# EAGLE board Mk4 Final a (EAGLE 9.0.1), part 1 of 3
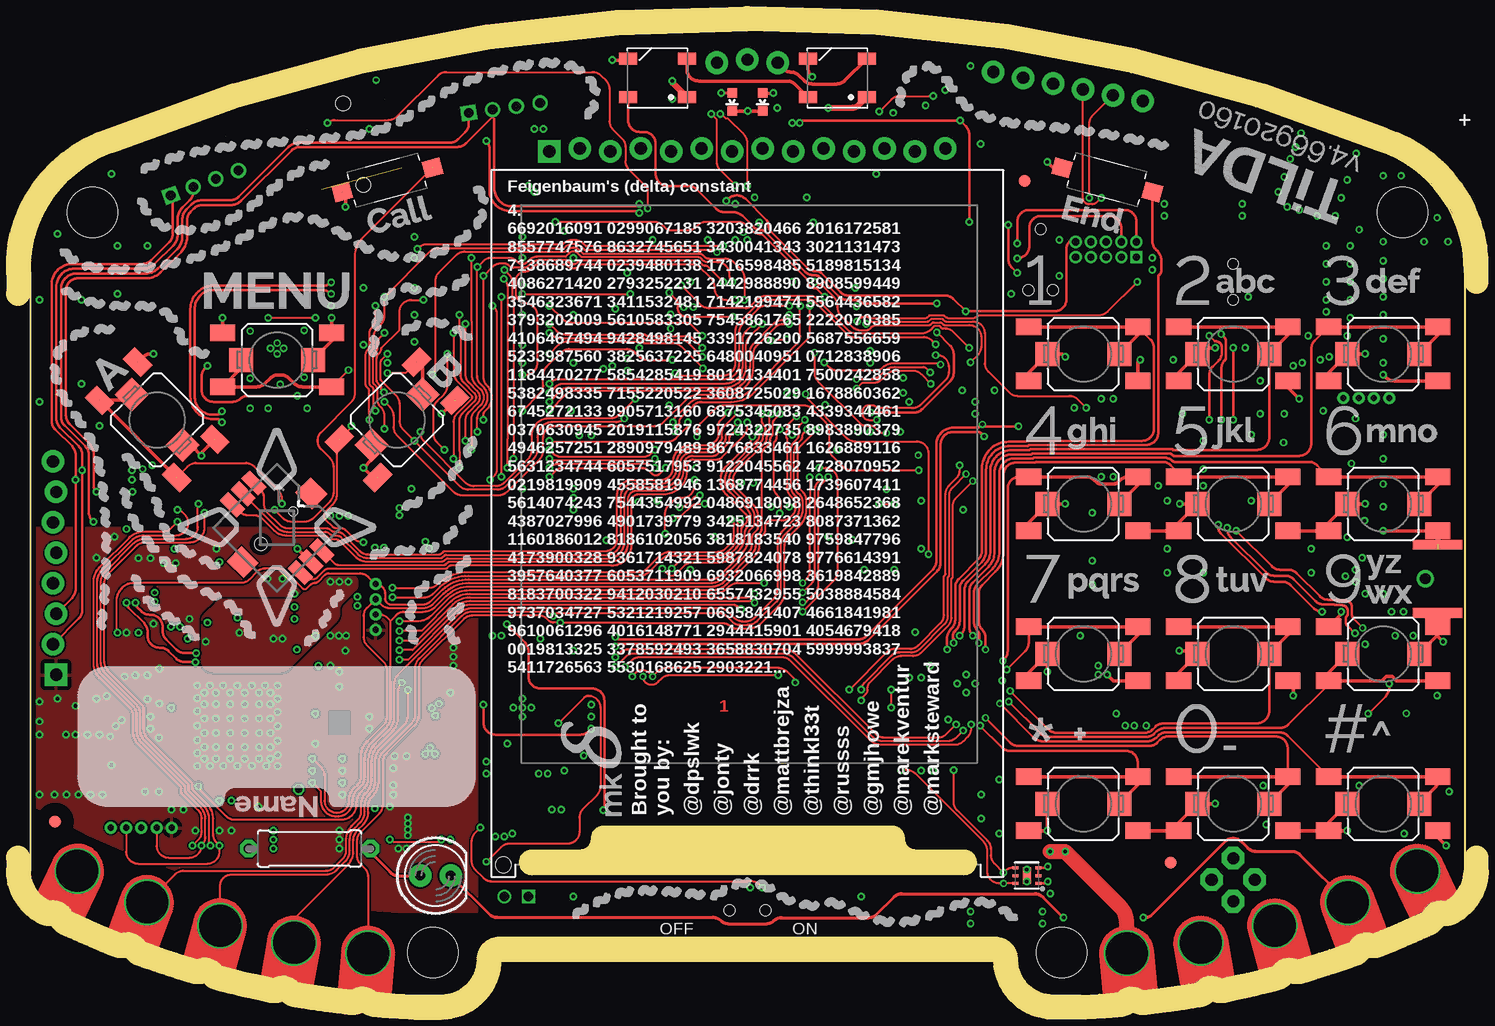
[diagram p0: board, top side]
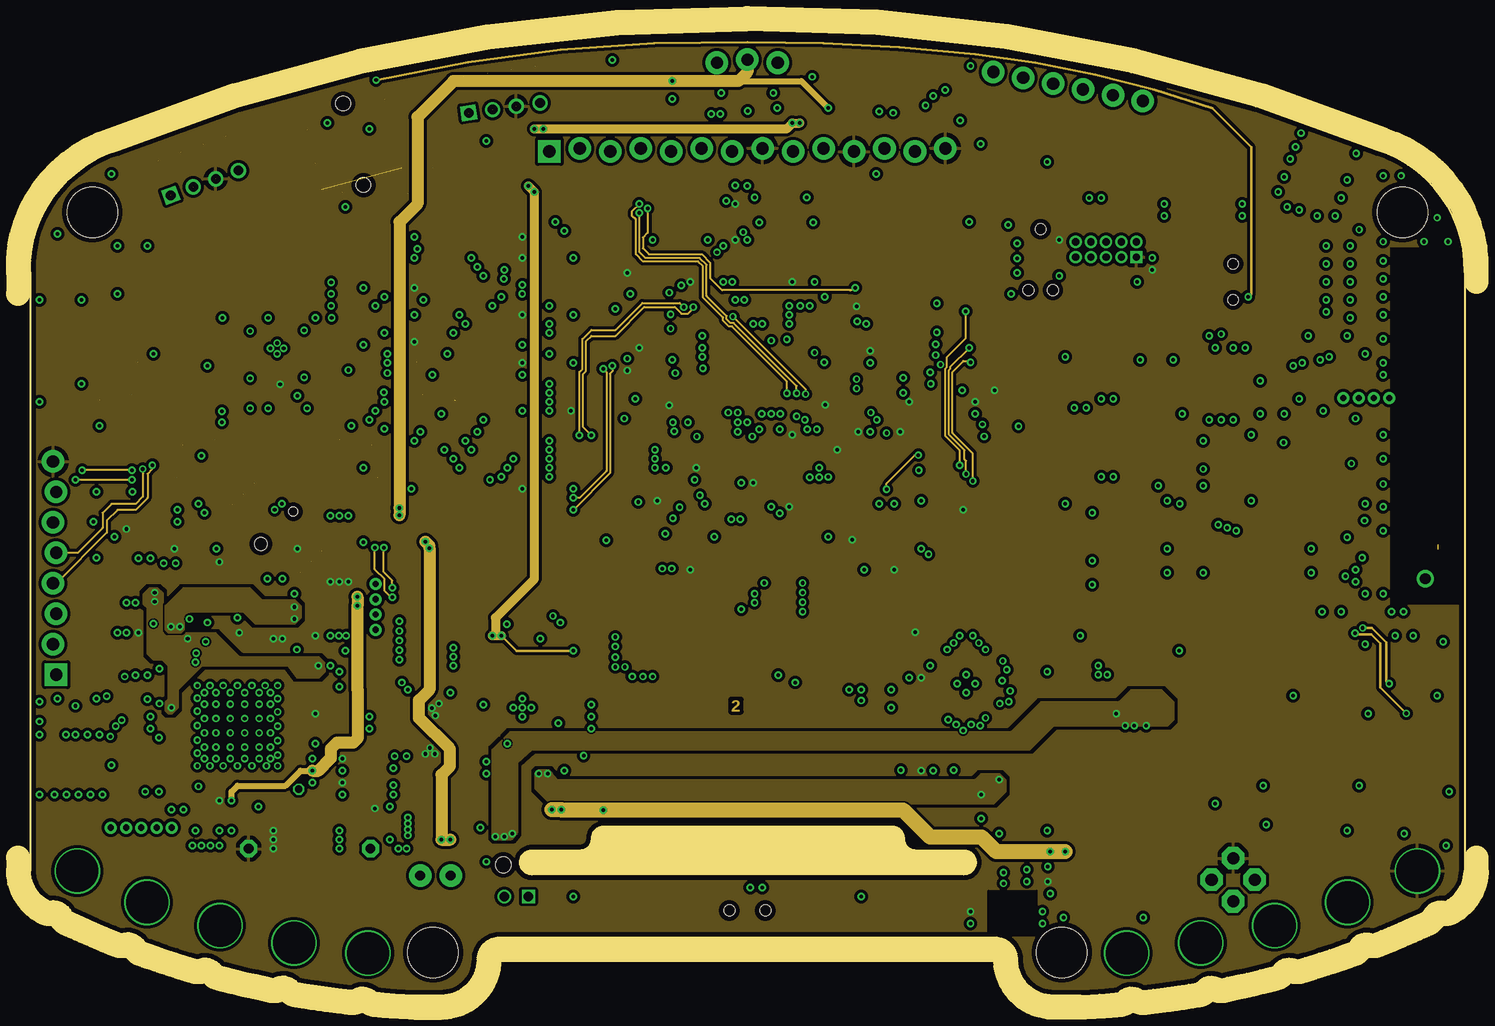
[diagram p1: board, inner layer 3V3@2]
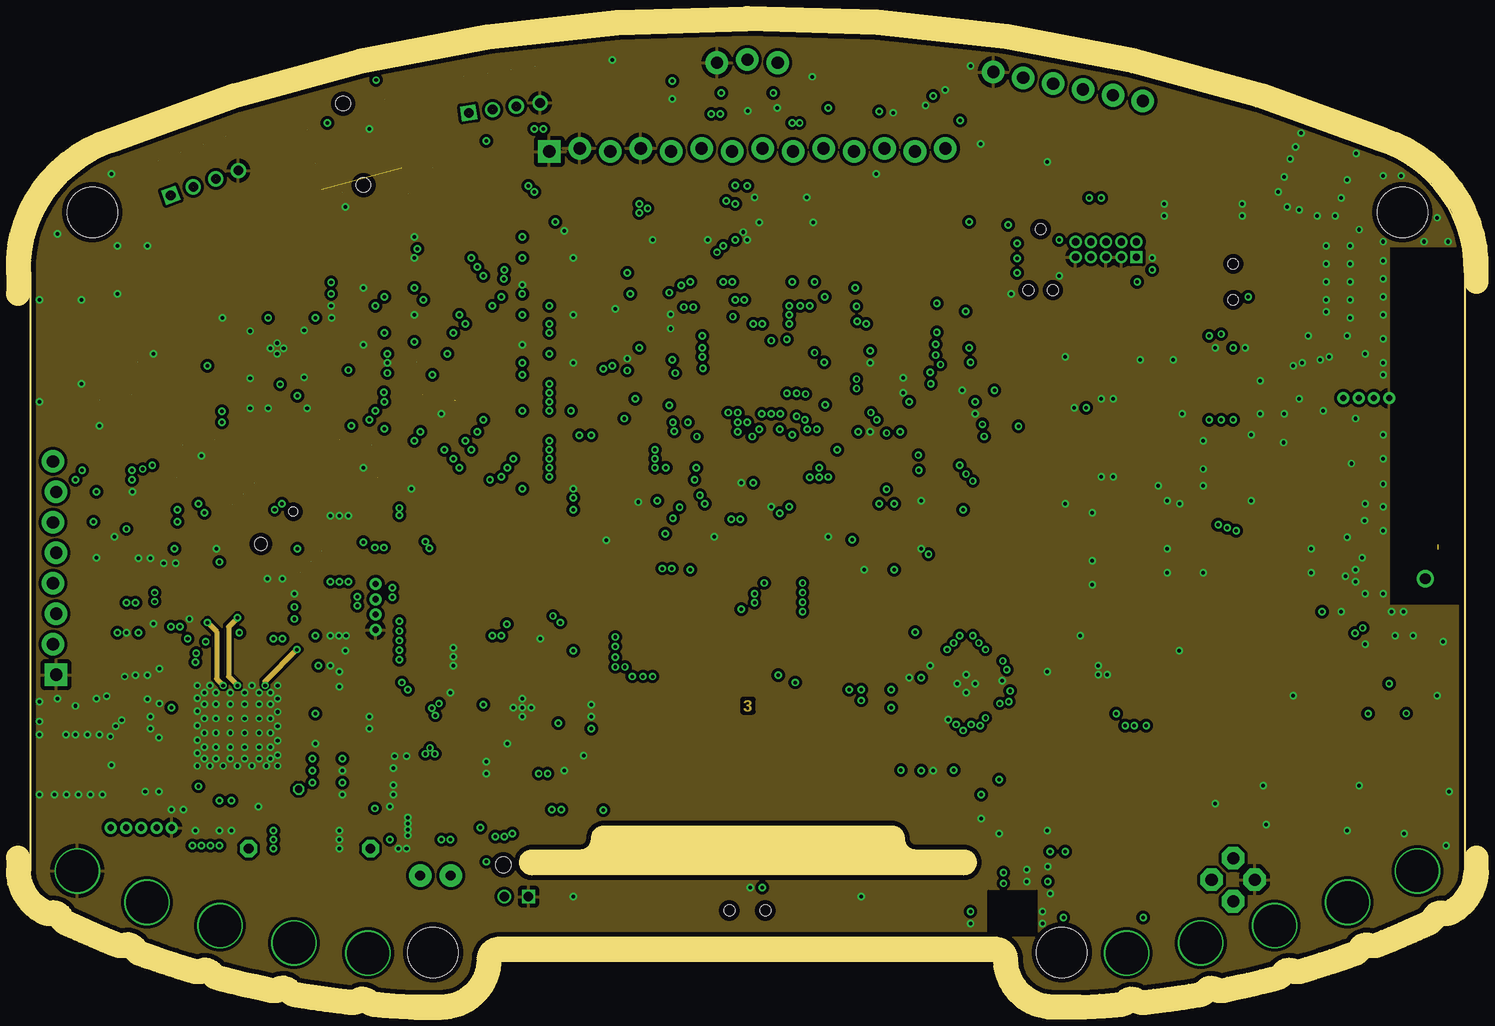
[diagram p2: board, inner layer GND@3]
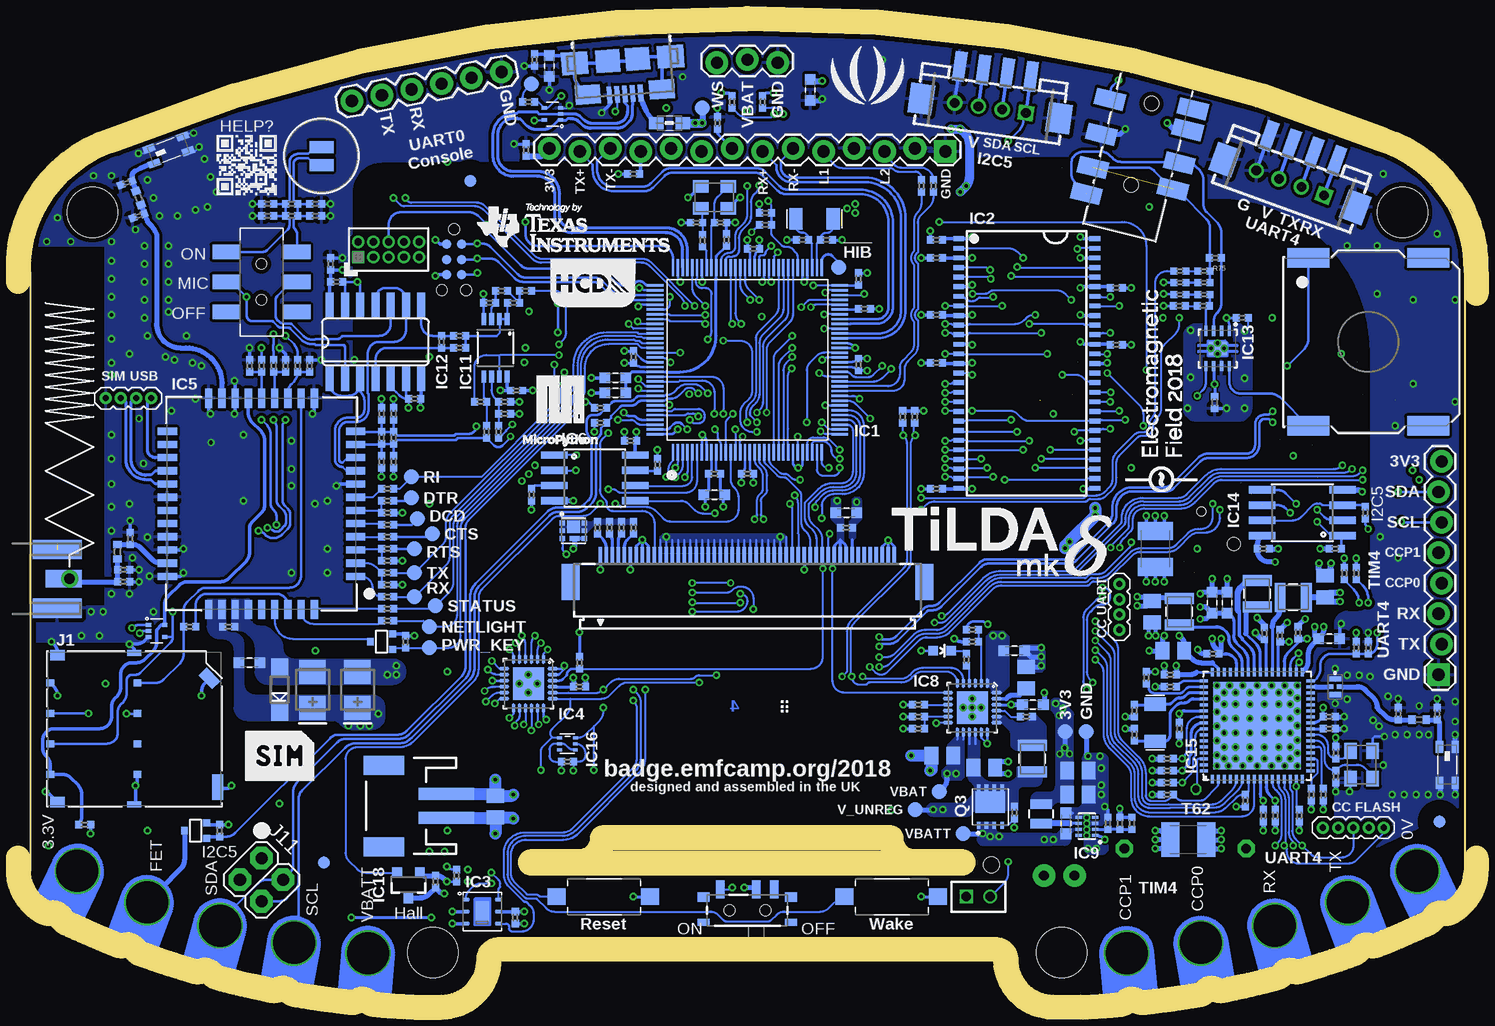
[diagram p3: board, bottom side, seen from below]

Size 119.6 x 80.5 mm. Coordinates in mm from the lower left corner, seen from the top.
Copper layers (1+2*15+16): Top 0.035mm / dielectric 0.22mm / 3V3@2 0.017mm / dielectric 1mm / GND@3 0.017mm / dielectric 0.22mm / Bottom 0.035mm
Design rules "little015mm  Round 4layer Newbury *": minimum track width 0.15mm, minimum drill 0.3mm, track to track 0.15mm, track to pad 0.15mm, pad to pad 0.15mm, via to via 0.15mm, smd to smd 0.15mm, copper to edge 0.4mm, drill to drill 0.3mm, minimum pad ring 0.15mm, minimum via ring 0.15mm, stop-mask expansion 0.1mm, vias tented up to drill 0.6mm, thermal gap 14mil
Net classes: 1 50R Single: width 0.4 mm, clearance 0.4 mm to class 0, clearance 0.4 mm; 2 90R Diff: width 0.25 mm, clearance 0.25 mm to class 0, clearance 0.4 mm to class 1, clearance 0.15 mm; 3 100R Diff: width 0.22 mm, clearance 0.25 mm to class 0, clearance 0.4 mm to class 1, clearance 0.25 mm to class 2, clearance 0.15 mm; 4 Audio: width 0.2 mm, clearance 0.25 mm to class 0, clearance 0.4 mm to class 1, clearance 0.25 mm to class 2, clearance 0.25 mm to class 3, clearance 0.15 mm
bRestrict: area 10.9,29.4 to 11.5,30.1

## Footprints (pad centres in the part's own frame; a part is rotated, then mirrored left to right if it is on the bottom)
2450AT18D0100 = smd 1 x 0.6: 1 -1.5,-0.65; 2 1.5,-0.65; 3 1.5,0.65; 4 -1.5,0.65
C0603K-SMALL = smd 0.889 x 0.889: 1 -0.875,0; 2 0.875,0
C0402-SMALLER = smd 0.6 x 0.6: 1 -0.5,0; 2 0.5,0
CT3528 = smd 2 x 2.2: + -1.5,0; - 1.5,0
C0805-N = smd 1.15 x 1.45: 1 -0.9,0; 2 0.9,0
C1210K = smd 1.5 x 2.9: 1 -1.5,0; 2 1.5,0
SOD123 = smd 1.4 x 1.4: A 1.9,0; C -1.9,0
R0402-SMALLER = smd 0.6 x 0.6: 1 -0.5,0; 2 0.5,0
FIDUCIAL-1X2.5-STOP = smd 1 x 1: 1 0,0
DEA202450BT = smd 0.45 x 1: GND@2 0.65,0; GND@4 -0.65,0 | smd 0.35 x 0.35: IN 0,-0.325; OUT 0,0.325
QFP128-0.4 = smd 0.2 x 1.4: 1 -6.2,-7.7; 2 -5.8,-7.7; 3 -5.4,-7.7; 4 -5,-7.7; 5 -4.6,-7.7; 6 -4.2,-7.7; 7 -3.8,-7.7; 8 -3.4,-7.7; 9 -3,-7.7; 10 -2.6,-7.7; 11 -2.2,-7.7; 12 -1.8,-7.7; 13 -1.4,-7.7; 14 -1,-7.7; 15 -0.6,-7.7; 16 -0.2,-7.7; 17 0.2,-7.7; 18 0.6,-7.7; 19 1,-7.7; 20 1.4,-7.7; 21 1.8,-7.7; 22 2.2,-7.7; 23 2.6,-7.7; 24 3,-7.7; 25 3.4,-7.7; 26 3.8,-7.7; 27 4.2,-7.7; 28 4.6,-7.7; 29 5,-7.7; 30 5.4,-7.7; 31 5.8,-7.7; 32 6.2,-7.7; 65 6.2,7.7; 66 5.8,7.7; 67 5.4,7.7; 68 5,7.7; 69 4.6,7.7; 70 4.2,7.7; 71 3.8,7.7; 72 3.4,7.7; 73 3,7.7; 74 2.6,7.7; 75 2.2,7.7; 76 1.8,7.7; 77 1.4,7.7; 78 1,7.7; 79 0.6,7.7; 80 0.2,7.7; 81 -0.2,7.7; 82 -0.6,7.7; 83 -1,7.7; 84 -1.4,7.7; 85 -1.8,7.7; 86 -2.2,7.7; 87 -2.6,7.7; 88 -3,7.7; 89 -3.4,7.7; 90 -3.8,7.7; 91 -4.2,7.7; 92 -4.6,7.7; 93 -5,7.7; 94 -5.4,7.7; 95 -5.8,7.7; 96 -6.2,7.7 | smd 1.4 x 0.2: 33 7.7,-6.2; 34 7.7,-5.8; 35 7.7,-5.4; 36 7.7,-5; 37 7.7,-4.6; 38 7.7,-4.2; 39 7.7,-3.8; 40 7.7,-3.4; 41 7.7,-3; 42 7.7,-2.6; 43 7.7,-2.2; 44 7.7,-1.8; 45 7.7,-1.4; 46 7.7,-1; 47 7.7,-0.6; 48 7.7,-0.2; 49 7.7,0.2; 50 7.7,0.6; 51 7.7,1; 52 7.7,1.4; 53 7.7,1.8; 54 7.7,2.2; 55 7.7,2.6; 56 7.7,3; 57 7.7,3.4; 58 7.7,3.8; 59 7.7,4.2; 60 7.7,4.6; 61 7.7,5; 62 7.7,5.4; 63 7.7,5.8; 64 7.7,6.2; 97 -7.7,6.2; 98 -7.7,5.8; 99 -7.7,5.4; 100 -7.7,5; 101 -7.7,4.6; 102 -7.7,4.2; 103 -7.7,3.8; 104 -7.7,3.4; 105 -7.7,3; 106 -7.7,2.6; 107 -7.7,2.2; 108 -7.7,1.8; 109 -7.7,1.4; 110 -7.7,1; 111 -7.7,0.6; 112 -7.7,0.2; 113 -7.7,-0.2; 114 -7.7,-0.6; 115 -7.7,-1; 116 -7.7,-1.4; 117 -7.7,-1.8; 118 -7.7,-2.2; 119 -7.7,-2.6; 120 -7.7,-3; 121 -7.7,-3.4; 122 -7.7,-3.8; 123 -7.7,-4.2; 124 -7.7,-4.6; 125 -7.7,-5; 126 -7.7,-5.4; 127 -7.7,-5.8; 128 -7.7,-6.2
TSOP54-400 = smd 0.4 x 0.9: 1 -10.4,-5.68; 2 -9.6,-5.68; 3 -8.8,-5.68; 4 -8,-5.68; 5 -7.2,-5.68; 6 -6.4,-5.68; 7 -5.6,-5.68; 8 -4.8,-5.68; 9 -4,-5.68; 10 -3.2,-5.68; 11 -2.4,-5.68; 12 -1.6,-5.68; 13 -0.8,-5.68; 14 0,-5.68; 15 0.8,-5.68; 16 1.6,-5.68; 17 2.4,-5.68; 18 3.2,-5.68; 19 4,-5.68; 20 4.8,-5.68; 21 5.6,-5.68; 22 6.4,-5.68; 23 7.2,-5.68; 24 8,-5.68; 25 8.8,-5.68; 26 9.6,-5.68; 27 10.4,-5.68; 28 10.4,5.68; 29 9.6,5.68; 30 8.8,5.68; 31 8,5.68; 32 7.2,5.68; 33 6.4,5.68; 34 5.6,5.68; 35 4.8,5.68; 36 4,5.68; 37 3.2,5.68; 38 2.4,5.68; 39 1.6,5.68; 40 0.8,5.68; 41 0,5.68; 42 -0.8,5.68; 43 -1.6,5.68; 44 -2.4,5.68; 45 -3.2,5.68; 46 -4,5.68; 47 -4.8,5.68; 48 -5.6,5.68; 49 -6.4,5.68; 50 -7.2,5.68; 51 -8,5.68; 52 -8.8,5.68; 53 -9.6,5.68; 54 -10.4,5.68
SHT2X = smd 0.3 x 0.5: 1 1,1.375; 2 0,1.375; 3 -1,1.375; 4 -1,-1.375; 5 0,-1.375; 6 1,-1.375 | smd 1.7 x 1.1: GND@DIE 0,0
QFN-24 = smd 0.85 x 0.25: 1 -2.05,1.25; 2 -2.05,0.75; 3 -2.05,0.25; 4 -2.05,-0.25; 5 -2.05,-0.75; 6 -2.05,-1.25; 13 2.05,-1.25; 14 2.05,-0.75; 15 2.05,-0.25; 16 2.05,0.25; 17 2.05,0.75; 18 2.05,1.25 | smd 0.25 x 0.9: 7 -1.25,-2.025; 8 -0.75,-2.025; 9 -0.25,-2.025; 10 0.25,-2.025; 11 0.75,-2.025; 12 1.25,-2.025; 19 1.25,2.025; 20 0.75,2.025; 21 0.25,2.025; 22 -0.25,2.025; 23 -0.75,2.025; 24 -1.25,2.025 | smd 2.7 x 2.6: 25 0,0
SIM800C = smd 1.6 x 0.6: 1 -7.85,6.05; 2 -7.85,4.95; 3 -7.85,3.85; 4 -7.85,2.75; 5 -7.85,1.65; 6 -7.85,0.55; 7 -7.85,-0.55; 8 -7.85,-1.65; 9 -7.85,-2.75; 10 -7.85,-3.85; 11 -7.85,-4.95; 12 -7.85,-6.05; 22 7.85,-6.05; 23 7.85,-4.95; 24 7.85,-3.85; 25 7.85,-2.75; 26 7.85,-1.65; 27 7.85,-0.55; 28 7.85,0.55; 29 7.85,1.65; 30 7.85,2.75; 31 7.85,3.85; 32 7.85,4.95; 33 7.85,6.05 | smd 0.6 x 1.6: 13 -4.4,-8.8; 14 -3.3,-8.8; 15 -2.2,-8.8; 16 -1.1,-8.8; 17 0,-8.8; 18 1.1,-8.8; 19 2.2,-8.8; 20 3.3,-8.8; 21 4.4,-8.8; 34 4.4,8.8; 35 3.3,8.8; 36 2.2,8.8; 37 1.1,8.8; 38 0,8.8; 39 -1.1,8.8; 40 -2.2,8.8; 41 -3.3,8.8; 42 -4.4,8.8
SO08-EIAJ = smd 0.61 x 2.21: 1 -1.905,-3.378; 2 -0.635,-3.378; 3 0.635,-3.378; 4 1.905,-3.378; 5 1.905,3.353; 6 0.635,3.353; 7 -0.635,3.353; 8 -1.905,3.353
DRL-5 = smd 0.3 x 0.45: 1 -0.5,-0.675; 2 0,-0.675; 3 0.5,-0.675; 4 0.5,0.675; 5 -0.5,0.675
VSON-HR = smd 0.55 x 0.25: 1 -0.675,0.75; 2 -0.675,0.25; 3 -0.675,-0.25; 4 -0.675,-0.75; 5 0.675,-0.75; 6 0.675,-0.25; 7 0.675,0.25; 8 0.675,0.75
VSSOP8 = smd 0.4 x 1: 1 -0.975,-2.4; 2 -0.325,-2.4; 3 0.325,-2.4; 4 0.975,-2.4; 5 0.975,2.4; 6 0.325,2.4; 7 -0.325,2.4; 8 -0.975,2.4
SO14 = smd 0.66 x 2.032: 1 -3.81,-3.073; 2 -2.54,-3.073; 3 -1.27,-3.073; 4 0,-3.073; 5 1.27,-3.073; 6 2.54,-3.073; 7 3.81,-3.073; 8 3.81,3.073; 9 2.54,3.073; 10 1.27,3.073; 11 0,3.073; 12 -1.27,3.073; 13 -2.54,3.073; 14 -3.81,3.073
VSON-8 = smd 0.85 x 0.28: 1 -1.475,0.975; 2 -1.475,0.325; 3 -1.475,-0.325; 4 -1.475,-0.975; 5 1.475,-0.975; 6 1.475,-0.325; 7 1.475,0.325; 8 1.475,0.975 | smd 1.15 x 1.5: PAD 0,0
VQFN-64 = smd 0.25 x 0.7: 1 -3.75,-4.45; 2 -3.25,-4.45; 3 -2.75,-4.45; 4 -2.25,-4.45; 5 -1.75,-4.45; 6 -1.25,-4.45; 7 -0.75,-4.45; 8 -0.25,-4.45; 9 0.25,-4.45; 10 0.75,-4.45; 11 1.25,-4.45; 12 1.75,-4.45; 13 2.25,-4.45; 14 2.75,-4.45; 15 3.25,-4.45; 16 3.75,-4.45; 33 3.75,4.45; 34 3.25,4.45; 35 2.75,4.45; 36 2.25,4.45; 37 1.75,4.45; 38 1.25,4.45; 39 0.75,4.45; 40 0.25,4.45; 41 -0.25,4.45; 42 -0.75,4.45; 43 -1.25,4.45; 44 -1.75,4.45; 45 -2.25,4.45; 46 -2.75,4.45; 47 -3.25,4.45; 48 -3.75,4.45 | smd 0.7 x 0.25: 17 4.45,-3.75; 18 4.45,-3.25; 19 4.45,-2.75; 20 4.45,-2.25; 21 4.45,-1.75; 22 4.45,-1.25; 23 4.45,-0.75; 24 4.45,-0.25; 25 4.45,0.25; 26 4.45,0.75; 27 4.45,1.25; 28 4.45,1.75; 29 4.45,2.25; 30 4.45,2.75; 31 4.45,3.25; 32 4.45,3.75; 49 -4.45,3.75; 50 -4.45,3.25; 51 -4.45,2.75; 52 -4.45,2.25; 53 -4.45,1.75; 54 -4.45,1.25; 55 -4.45,0.75; 56 -4.45,0.25; 57 -4.45,-0.25; 58 -4.45,-0.75; 59 -4.45,-1.25; 60 -4.45,-1.75; 61 -4.45,-2.25; 62 -4.45,-2.75; 63 -4.45,-3.25; 64 -4.45,-3.75 | smd 7.3 x 7.3: PAD 0,0
SOT563 = smd 0.25 x 0.4: 1 -0.5,-0.66; 2 0,-0.66; 3 0.5,-0.66; 4 0.5,0.66; 5 0,0.66; 6 -0.5,0.67
USON-6 = smd 0.5 x 0.25: 1 -0.95,0.65; 2 -0.95,0; 3 -0.95,-0.65; 4 0.95,-0.65; 5 0.95,0; 6 0.95,0.65 | smd 0.65 x 1.35: PAD 0,0
SOT23-3 = smd 0.8 x 0.9: 1 -0.95,-1; 2 0.95,-1; 3 0,1.1
MSIM-MOLEX-LWK = smd 0.65 x 0.55: C1 0.61,3.81; C2 0.61,1.27; C3 0.61,-1.27; C4 0.61,-3.81; C5 -6.65,3.81; C6 -6.65,1.27; C7 -6.65,-1.27; C8 -6.65,-3.81 | smd 1.2 x 0.89: GND1 0,6.125; GND2 0,-6.125 | smd 1.6 x 0.94 rotated 315: GND3 -12.67,-4.19 | smd 1.2 x 0.52: GND4 -6.39,6.31; GND5 -6.39,-6.31 | smd 0.94 x 2.1: GND6 -13.35,4.88
FH12-50S-0.5SH = smd 0.3 x 1.3: 1 -12.25,3.25; 2 -11.75,3.25; 3 -11.25,3.25; 4 -10.75,3.25; 5 -10.25,3.25; 6 -9.75,3.25; 7 -9.25,3.25; 8 -8.75,3.25; 9 -8.25,3.25; 10 -7.75,3.25; 11 -7.25,3.25; 12 -6.75,3.25; 13 -6.25,3.25; 14 -5.75,3.25; 15 -5.25,3.25; 16 -4.75,3.25; 17 -4.25,3.25; 18 -3.75,3.25; 19 -3.25,3.25; 20 -2.75,3.25; 21 -2.25,3.25; 22 -1.75,3.25; 23 -1.25,3.25; 24 -0.75,3.25; 25 -0.25,3.25; 26 0.25,3.25; 27 0.75,3.25; 28 1.25,3.25; 29 1.75,3.25; 30 2.25,3.25; 31 2.75,3.25; 32 3.25,3.25; 33 3.75,3.25; 34 4.25,3.25; 35 4.75,3.25; 36 5.25,3.25; 37 5.75,3.25; 38 6.25,3.25; 39 6.75,3.25; 40 7.25,3.25; 41 7.75,3.25; 42 8.25,3.25; 43 8.75,3.25; 44 9.25,3.25; 45 9.75,3.25; 46 10.25,3.25; 47 10.75,3.25; 48 11.25,3.25; 49 11.75,3.25; 50 12.25,3.25 | smd 1.5 x 3: 51 -14.75,1; 52 14.75,1
PINHEAD_2X05_127 = drill 0.6 pad 1.016 square: 1 -2.54,-0.635 | drill 0.6 pad 1.016: 2 -2.54,0.635; 3 -1.27,-0.635; 4 -1.27,0.635; 5 0,-0.635; 6 0,0.635; 7 1.27,-0.635; 8 1.27,0.635; 9 2.54,-0.635; 10 2.54,0.635
GSM-ANTENNA = drill 0.9 pad 1.422: ANT 0,0
JST-2-SMD = smd 1 x 4.6: 1 -1,-3.7; 2 1,-3.7 | smd 1.6 x 3.4: NC1 -3.4,1.5; NC2 3.4,1.5
J502-ND-142-0711-821/826-LWK1 = smd 3 x 1.422: 1 2.815,0 | smd 4.1 x 1.6: G@1 2.265,2.45; G@2 2.265,-2.45 | smd 4.1 x 0.8 bottom: G@3 2.265,2.85; G@4 2.265,-2.85
HW4-2.0-SWD-COMBINED = drill 0.8 pad 1.27 square: 1 -3,0 | drill 0.8 pad 1.27: 2 -1,0; 3 1,0; 4 3,0 | smd 1 x 2.5: 5 -3,-3.073; 6 -1,-3.073; 7 1,-3.073; 8 3,-3.073 | smd 2 x 2.5: SS1 -5.8,0.05; SS2 5.8,0.05
PJ-393-A = smd 1.4 x 2.5: 1 2.8,-3.45; 2 8.8,3.45; 3 8.65,-3.45; 4 5.8,-3.45; 5 10.9,-3.45; 6 6.55,3.45; 7 3.7,3.45; 8 1.9,3.45 | hole 1.2: 2.3,0; 9.3,0
2X2 = drill 1.016 pad 1.88 octagon: 1 -1.27,-1.27; 2 -1.27,1.27; 3 1.27,-1.27; 4 1.27,1.27
1X05-1.27MM = drill 0.508 pad 1: 1 0,0; 2 1.27,0; 3 2.54,0; 4 3.81,0; 5 5.08,0
1X03_LOCK = drill 1.016 pad 1.88: 1 0,0.127; 2 2.54,-0.127; 3 5.08,0.127
1X02_2MM = drill 0.8 square: 1 0,0 | drill 0.8: 2 2,0
TC2030-MCP-NL = smd 0.787 x 0.787: 1 1.27,-0.635; 2 1.27,0.635; 3 2.54,-0.635; 4 2.54,0.635; 5 3.81,-0.635; 6 3.81,0.635 | hole 0.889: 0,0; 5.08,-1.016; 5.08,1.016
1X04-1.27MM = drill 0.508 pad 1: 1 0,0; 2 1.27,0; 3 2.54,0; 4 3.81,0
1X08_LOCK = drill 1.016 pad 1.88 square: 1 0,0.127 | drill 1.016 pad 1.88: 2 2.54,-0.127; 3 5.08,0.127; 4 7.62,-0.127; 5 10.16,0.127; 6 12.7,-0.127; 7 15.24,0.127; 8 17.78,-0.127
1X14_LOCK = drill 1.016 pad 1.88 square: 1 0,0.127 | drill 1.016 pad 1.88: 2 2.54,-0.127; 3 5.08,0.127; 4 7.62,-0.127; 5 10.16,0.127; 6 12.7,-0.127; 7 15.24,0.127; 8 17.78,-0.127; 9 20.32,0.127; 10 22.86,-0.127; 11 25.4,0.127; 12 27.94,-0.127; 13 30.48,0.127; 14 33.02,-0.127
1X06 = drill 1.016 pad 1.88: 1 0,0; 2 2.54,0; 3 5.08,0; 4 7.62,0; 5 10.16,0; 6 12.7,0
1008 = smd 0.9 x 2.4: 1 -1.1,0; 2 1.1,0
WUERTH-0805 = smd 1.2 x 1: 1 -1.1,0; 2 1.1,0
L0402 = smd 0.6 x 0.7: 1 -0.6,0; 2 0.6,0
0806 = smd 0.8 x 1.8: 1 -0.8,0; 2 0.8,0
ER-TFT024-3 = hole 1.3: -20.35,-22.6
WS2812B = smd 1.5 x 1: 1 -2.45,1.6; 2 -2.45,-1.6; 3 2.45,-1.6; 4 2.45,1.6
LED-0603-CORRECT = smd 0.8 x 0.8: A 0.75,0; C -0.75,0
LED5MM = drill 0.813 pad 1.88: A -1.27,0; K 1.27,0
TILDA_MK4_OUTLINE_TALL_V1 = drill 3.5: 3V3 55.856,10.386; CH1 -31.617,3.538; CH2 -37.798,4.386; CH3 -43.962,5.833; CH4 -50.042,7.771; FET 50.042,7.771; GND -55.856,10.386; SCL 37.798,4.386; SDA 43.962,5.833; VBATT 31.617,3.538 | hole 4.2: 26.2,3.6; -26.2,3.6; 54.6,65.3; -54.6,65.3
SC70-3-R = smd 0.6 x 0.55: 1 -0.65,-0.925; 2 0.65,-0.925; 3 0,0.925
Q3A = smd 0.3 x 0.6: 1 -0.975,-1.55; 2 -0.325,-1.55; 3 0.325,-1.55; 4 0.975,-1.55; 5 0.975,1.55; 6 0.325,1.55; 7 -0.325,1.55; 8 -0.975,1.55 | smd 2.45 x 1.775: EP 0,0.375
Q2 = smd 0.4 x 0.455: 1 -0.65,-0.922; 2 0,-0.922; 3 0.65,-0.922; 4 0.65,0.922; 5 0,0.922; 6 -0.65,0.922 | smd 1.05 x 1.1: EP1 -0.325,0 | smd 0.4 x 0.85: EP2 0.65,0.1
0309/10 = drill 0.813 pad 1.422 octagon: 1 -5.08,0; 2 5.08,0
SKPMAPE010-COMBINED = smd 2 x 2: 1 -3,0; 2 3,0 | smd 2.1 x 1.4: A1 -4.55,-2.25; A2 4.55,-2.25; B1 -4.55,2.25; B2 4.55,2.25
TACTILE_SWITCH_SMD_3X6X2.5H = smd 1.5 x 1.4: 1 -3.9,0; 2 3.9,0
SWITCH-SPST-SMD-A = smd 0.7 x 1.5: 1 -2.25,-1.75; 2 -0.75,-1.75; 3 2.25,-1.75 | smd 1 x 0.6: GND1 -3.65,1; GND3 3.65,1 | smd 1 x 0.8: GND2 -3.65,-1.1; GND4 3.65,-1.1 | hole 0.9: -1.5,0; 1.5,0
AYZ-JS-COMBINED = smd 1.2 x 2.2: 1 -2.5,2.975; 2 0,2.975; 3 2.5,2.975; 4 -2.5,-2.975; 5 0,-2.975; 6 2.5,-2.975 | hole 0.85: 1.5,0; -1.5,0
JOYSTICK_MULTICOMP_NOSILK = smd 2 x 1: A -4,1.275; B 4,1.275; C -4,-1.275; COM 4,0; CTR -4,0; D 4,-1.275 | smd 2 x 1.8: NC 0,4.05; NC@0 0,-4.05 | hole 0.75: 0,1.9 | hole 1.05: 0,-1.9
B1,27 = smd 1.27 x 1.27: TP 0,0
P1-06-OCT-CAN = drill 0.6 octagon: TP 0,0
USB-AB-MICRO-SMD_LWK = smd 1.4 x 0.4: D+ 2.85,0; D- 2.85,0.65; GND 2.85,-1.3; ID 2.85,-0.65; VBUS 2.85,1.3 | smd 1.6 x 2.1: SHIELD 2.675,3.1; SHIELD@5 2.675,-3.1 | smd 1.9 x 2: SHIELD@0 0,1.25; SHIELD@1 0,-1.25 | smd 1.9 x 2.2: SHIELD@2 0,-4; SHIELD@3 0,4
MIC-SMD-6MM = smd 1 x 2: + -0.75,0; - 0.75,0
SPEAKER-15MM-SMD = smd 1.6 x 3.5: + -7,-5; - 7,-5; DUMMY@3 7,5; DUMMY@4 -7,5
RESONATOR_EPSON_FC_145 = smd 1.1 x 1.8: P$1 -1.55,0; P$2 1.55,0
CRYSTAL-3.2-2.5 = smd 1.3 x 1.05: 1 -1.15,-0.925; 2 1.15,-0.925; 3 1.15,0.925; 4 -1.15,0.925

## Placement (x,y rotation side)
ANT1  2450AT18D0100  [2450AT18D0100]  1.45,19.25 270 bottom
ANT2  2450AT18D0100  [2450AT18D0100]  108.05,70.5 20 bottom
ARTWORK1  ARTWORK_JOYSTICK  [TILDA_ARTWORK_JOYSTICK]  20.6,39 0 top
ARTWORK2  ARTWORK_KEYPAD-2  [TILDA_ARTWORK_KEYPAD-2]  59.8,0 0 top
ARTWORK3  ARTWORK_NAME  [TILDA_ARTWORK]  47.95,37.05 0 bottom
ARTWORK4  ARTWORK_MKDELTA  [TILDA_ARTWORK_MKDELTA]  37.3,35 0 bottom
ARTWORK5  ARTWORK_NAME_BLOCK  [TILDA_ARTWORK_NAME]  37.3,28 180 top
ARTWORK6  ARTWORK_MK4-JAKE  [TILDA_ARTWORK_JAKE]  59.8,0 0 top
ARTWORK7  ARTWORK_QR-2018  [TILDA_ARTWORK_QR-2018]  104.05,66.75 0 bottom
BATT  1000mAh JST-PH  [BATTERY-32X50]  59.3,12 90 top
C1  0603/1u/6V3/X5R  [C0603K-SMALL]  54.55,75.5 270 bottom
C2  0402/100n/10V/X5R  [C0402-SMALLER]  69.55,46.25 0 bottom
C3  0402/100n/10V/X5R  [C0402-SMALLER]  62.3,72.75 270 bottom
C4  0402/100n/10V/X5R  [C0402-SMALLER]  69.3,68.5 0 bottom
C5  0402/100n/10V/X5R  [C0402-SMALLER]  78.25,70.5 270 bottom
C6  0603/2u2/6V3/X5R  [C0603K-SMALL]  70.8,51.5 0 bottom
C7  0603/1u/6V3/X5R  [C0603K-SMALL]  70.8,50.25 0 bottom
C8  0402/100n/10V/X5R  [C0402-SMALLER]  61.55,63 270 bottom
C9  0402/100n/10V/X5R  [C0402-SMALLER]  69.3,53.25 90 bottom
C10  0402/100n/10V/X5R  [C0402-SMALLER]  50.55,52.6 270 bottom
C11  0402/100n/10V/X5R  [C0402-SMALLER]  59.3,62.25 0 bottom
C12  0402/100n/10V/X5R  [C0402-SMALLER]  59.8,43.5 180 bottom
C13  0402/100n/10V/X5R  [C0402-SMALLER]  62.55,43.5 180 bottom
C14  0603/1u/6V3/X5R  [C0603K-SMALL]  62.55,41.75 180 bottom
C15  0402/100n/10V/X5R  [C0402-SMALLER]  58.3,64.25 0 bottom
C16  0402/12p/50V/C0G  [C0402-SMALLER]  62.05,64.45 180 bottom
C17  0402/12p/50V/C0G  [C0402-SMALLER]  64.05,64.45 0 bottom
C18  0402/12p/50V/C0G  [C0402-SMALLER]  53.2,63 180 bottom
C19  0402/12p/50V/C0G  [C0402-SMALLER]  55.2,63 0 bottom
C20  0603/3n3/50V/X7R  [C0603K-SMALL]  76.3,77.5 90 bottom
C21  0402/100n/10V/X5R  [C0402-SMALLER]  73.8,25.75 180 bottom
C22  0402/100n/10V/X5R  [C0402-SMALLER]  44.05,61.5 0 bottom
C23  0402/100n/10V/X5R  [C0402-SMALLER]  44.05,56.75 0 bottom
C24  0402/100n/10V/X5R  [C0402-SMALLER]  29.05,54.25 180 bottom
C25  0402/100n/10V/X5R  [C0402-SMALLER]  44.05,52.75 0 bottom
C26  0402/100n/10V/X5R  [C0402-SMALLER]  44.05,63 0 bottom
C27  0402/100n/10V/X5R  [C0402-SMALLER]  29.05,59 180 bottom
C28  0402/100n/10V/X5R  [C0402-SMALLER]  44.05,42.25 0 bottom
C29  1411/100u/10V/Tant  [CT3528]  96.05,25.5 90 bottom
C30  0603/4u7/10V/X5R  [C0603K-SMALL]  101.3,27.75 180 bottom
C31  0402/100n/10V/X5R  [C0402-SMALLER]  103.05,30.75 180 bottom
C32  1411/100u/10V/Tant  [CT3528]  92.3,25.5 90 bottom
C33  0805/10u/10V/X5R  [C0805-N]  32.25,18.75 0 bottom
C34  0805/10u/10V/X5R  [C0805-N]  80.8,15.75 270 bottom
C35  0805/10u/10V/X5R  [C0805-N]  43.55,20 180 bottom
C36  0805/10u/10V/X5R  [C0805-N]  36.55,26.5 90 bottom
C37  0402/47n/10V/X5R  [C0402-SMALLER]  36.55,23.25 0 bottom
C38  0603/4u7/10V/X5R  [C0603K-SMALL]  51.55,40.25 180 bottom
C39  0603/4u7/10V/X5R  [C0603K-SMALL]  36,24.25 180 bottom
C40  0805/10u/10V/X5R  [C0805-N]  40.05,19 0 bottom
C41  0603/1u/6V3/X5R  [C0603K-SMALL]  37.55,28.75 0 bottom
C42  1210/100u/6V3/X5R  [C1210K]  25.8,37.25 270 bottom
C43  1210/100u/6V3/X5R  [C1210K]  23.05,13 0 bottom
C44  0402/100n/10V/X5R  [C0402-SMALLER]  13.9,30.25 90 bottom
C45  0402/100n/10V/X5R  [C0402-SMALLER]  51.55,39 180 bottom
C46  0603/4u7/10V/X5R  [C0603K-SMALL]  33.25,14.35 90 bottom
C47  0805/10u/10V/X5R  [C0805-N]  32.25,16.75 0 bottom
C48  0402/22p/10V/C0G  [C0402-SMALLER]  101.3,52.5 270 bottom
C49  0402/22p/10V/C0G  [C0402-SMALLER]  98.3,52.5 270 bottom
C50  0402/22p/10V/C0G  [C0402-SMALLER]  96.3,52.5 270 bottom
C51  0402/100n/10V/X5R  [C0402-SMALLER]  115.05,14.25 180 bottom
C52  0402/33p/50V/C0G  [C0402-SMALLER]  97.8,66 0 bottom
C53  0402/10p/50V/C0G  [C0402-SMALLER]  95.8,65 0 bottom
C54  0402/33p/50V/C0G  [C0402-SMALLER]  99.8,66 180 bottom
C55  0402/33p/50V/C0G  [C0402-SMALLER]  95.8,66 0 bottom
C56  0402/10p/50V/C0G  [C0402-SMALLER]  97.8,65 0 bottom
C57  0402/10p/50V/C0G  [C0402-SMALLER]  99.8,65 180 bottom
C58  0402/100n/10V/X5R  [C0402-SMALLER]  20.85,49.45 270 bottom
C59  0402/100n/10V/X5R  [C0402-SMALLER]  16.8,37.25 180 bottom
C60  0402/100n/10V/X5R  [C0402-SMALLER]  8.05,29 270 bottom
C61  0402/100n/10V/X5R  [C0402-SMALLER]  24.55,26.75 180 bottom
C62  0402/100n/10V/X5R  [C0402-SMALLER]  11.3,23.25 0 bottom
C63  0805/10u/10V/X5R  [C0805-N]  11.65,34.1 90 bottom
C64  0402/33p/50V/C0G  [C0402-SMALLER]  89.3,46.5 90 bottom
C65  0402/10p/50V/C0G  [C0402-SMALLER]  90.3,48.5 90 bottom
C66  0402/33p/50V/C0G  [C0402-SMALLER]  89.3,44.5 270 bottom
C67  0402/33p/50V/C0G  [C0402-SMALLER]  89.3,48.5 90 bottom
C68  0402/10p/50V/C0G  [C0402-SMALLER]  90.3,46.5 90 bottom
C69  0402/10p/50V/C0G  [C0402-SMALLER]  90.3,44.5 270 bottom
C70  0402/100n/10V/X5R  [C0402-SMALLER]  79.05,50.45 180 bottom
C71  0402/100n/10V/X5R  [C0402-SMALLER]  94.55,61 270 bottom
C72  [C0402-SMALLER]  111.25,38.1 270 bottom
C73  [C0402-SMALLER]  111.8,35.5 180 bottom
C74  [C0402-SMALLER]  110.55,65 20 bottom
C75  [C0402-SMALLER]  111.55,67.75 20 bottom
C76  [C0402-SMALLER]  5.55,23.5 270 bottom
C77  [C0402-SMALLER]  2.3,23.5 270 bottom
C78  0402/1n/10V/X5R  [C0402-SMALLER]  81.3,57.75 0 bottom
C79  0402/2n2/10V/X5R  [C0402-SMALLER]  79.3,57.75 0 bottom
C80  0402/100n/10V/X5R  [C0402-SMALLER]  83.8,55 0 bottom
C81  0402/100n/10V/X5R  [C0402-SMALLER]  83.8,54 0 bottom
C82  0402/220n/6V3/X5R  [C0402-SMALLER]  23.75,58.45 180 bottom
C83  0402/220n/6V3/X5R  [C0402-SMALLER]  23.75,59.45 180 bottom
C84  0603/22u/4V/X5R  [C0603K-SMALL]  21.05,32.75 90 bottom
C85  0603/22u/4V/X5R  [C0603K-SMALL]  19.8,32.75 90 bottom
C86  0603/1u/6V3/X5R  [C0603K-SMALL]  11.3,29.75 0 bottom
C87  0805/10u/10V/X5R  [C0805-N]  26.05,32 270 bottom
C88  0402/4u7/6V3/X5R  [C0402-SMALLER]  15.4,30 90 bottom
C89  0402/4u7/6V3/X5R  [C0402-SMALLER]  21,28.5 180 bottom
C90  0402/4u7/6V3/X5R  [C0402-SMALLER]  16.7,30.2 90 bottom
C91  0402/100n/10V/X5R  [C0402-SMALLER]  15.8,15 270 bottom
C92  0402/100n/10V/X5R  [C0402-SMALLER]  23.8,22.25 270 bottom
C93  0805/10u/10V/X5R  [C0805-N]  24.3,28.75 180 bottom
C94  0402/100n/10V/X5R  [C0402-SMALLER]  11.3,22.25 0 bottom
C95  0402/100n/10V/X5R  [C0402-SMALLER]  24.55,25.75 180 bottom
C96  0402/100n/10V/X5R  [C0402-SMALLER]  24.8,18.75 180 bottom
C97  0402/100n/10V/X5R  [C0402-SMALLER]  16.8,15 270 bottom
C98  0402/12p/50V/C0G  [C0402-SMALLER]  10.75,20.25 270 bottom
C99  0402/12p/50V/C0G  [C0402-SMALLER]  10.75,18.25 90 bottom
C100  0402/12p/50V/C0G  [C0402-SMALLER]  27.55,21.75 270 bottom
C101  0402/12p/50V/C0G  [C0402-SMALLER]  27.55,23.75 90 bottom
C102  0402/100n/10V/X5R  [C0402-SMALLER]  74.8,19.5 180 bottom
C103  0402/120p/50V/C0G  [C0402-SMALLER]  27.75,14.35 270 bottom
C104  0402/100n/10V/X5R  [C0402-SMALLER]  84.05,10 90 bottom
C105  0402/220n/6V3/X5R  [C0402-SMALLER]  23.75,60.4 180 bottom
C106  0402/220n/6V3/X5R  [C0402-SMALLER]  23.8,57.5 180 bottom
C107  0402/100n/10V/X5R  [C0402-SMALLER]  79.15,6.5 270 bottom
C108  0402/100n/10V/X5R  [C0402-SMALLER]  85.8,9.5 270 bottom
D1  MMSZ5231BT1G  [SOD123]  98.8,25.5 90 bottom
D2  LXES15AAA1-153  [R0402-SMALLER]  111.8,34.5 0 bottom
FID1  FIDUCIAL1X2.5-STOP  [FIDUCIAL-1X2.5-STOP]  95.1,11.1 270 top
FID2  FIDUCIAL1X2.5-STOP  [FIDUCIAL-1X2.5-STOP]  2.1,14.5 180 bottom
FID3  FIDUCIAL1X2.5-STOP  [FIDUCIAL-1X2.5-STOP]  82.9,67.9 180 top
FID4  FIDUCIAL1X2.5-STOP  [FIDUCIAL-1X2.5-STOP]  82.9,67.9 180 bottom
FID5  FIDUCIAL1X2.5-STOP  [FIDUCIAL-1X2.5-STOP]  2.1,14.5 180 top
FID6  FIDUCIAL1X2.5-STOP  [FIDUCIAL-1X2.5-STOP]  95.1,11.1 270 bottom
FL1  DEA202450BT-1294C1-H  [DEA202450BT]  10.8,25.75 270 bottom
IC1  MSP432E401  [QFP128-0.4]  59.8,53 0 bottom
IC2  AS4C4M16SA-7TCN  [TSOP54-400]  36.5,52.7 270 bottom
IC3  HDC2080DMBR  [SHT2X]  81.9,7 90 bottom
IC4  TCA9555RGER  [QFN-24]  78.05,26 270 bottom
IC5  SIM800C24 S2-10686-Z1L09  [SIM800C]  100.3,41 180 bottom
IC6  MX25R8035FM1IH1  [SO08-EIAJ]  72.5,43.15 270 bottom
IC7  TPD3E001DRL  [DRL-5]  76.05,73.5 90 bottom
IC8  BQ25601  [QFN-24]  41.05,24 270 bottom
IC9  TPS62822DLCR  [VSON-HR]  31.5,14.1 180 bottom
IC10  TPD3E001DRL  [DRL-5]  109.05,30.4 270 bottom
IC11  TLV9002IDGK  [VSSOP8]  80.8,54 180 bottom
IC12  SN74HC4066D  [SO14]  90.8,54.5 0 bottom
IC13  TPA2006D1  [VSON-8]  20.6,53.95 270 bottom
IC14  MX25R1635FM1IL0  [SO08-EIAJ]  13.55,40.25 90 bottom
IC15  CC3120R  [VQFN-64]  17.3,22.5 0 bottom
IC16  TMP102AIDRLR  [SOT563]  74.8,21 270 bottom
IC17  OPT3001DNPR  [USON-6]  83.1,10 180 top
IC18  DRV5055A1QDBZR  [SOT23-3]  88.05,9.25 180 bottom
J1  78723-1001  [MSIM-MOLEX-LWK]  117.3,22.25 180 bottom
J2  ER-CON50HT-1  [FH12-50S-0.5SH]  59.8,33.5 0 bottom
J3  2x5 1.27mm  [PINHEAD_2X05_127]  89.7,62.2 0 bottom
J4  GSM-COIL-ANT  [GSM-ANTENNA]  116.3,34.75 0 bottom
J5  S2B-PH-SM4-TB(LF)(SN)  [JST-2-SMD]  88.6,15.8 90 bottom
J7  SMA-142-0711-821/826  [J502-ND-142-0711-821/826-LWK1]  119.6,34.75 0 bottom
J8  H4P-SMD-2.0  [HW4-2.0-SWD-COMBINED]  39.55,74 172 bottom
J9  PJ-393-A  [PJ-393-A]  25.55,76.6 256 bottom
J10  H4P-SMD-2.0  [HW4-2.0-SWD-COMBINED]  14.55,67.75 160 bottom
J11  M02X2  [2X2]  100.3,9.65 315 bottom
JP1  1x5 1.27mm  [1X05-1.27MM]  11.82,14 0 bottom
JP2  1x03  [1X03_LOCK]  57.26,77.9 180 bottom
JP3  1x02 2MM  [1X02_2MM]  41.55,8.25 0 bottom
JP4  TC2030-MCP-NL  [TC2030-MCP-NL]  84.25,63.9 270 bottom
JP5  1x4 1.27mm  [1X04-1.27MM]  28.8,30.5 90 bottom
JP6  1x8  [1X08_LOCK]  2.05,26.75 90 bottom
JP7  1x14  [1X14_LOCK]  43.29,70.5 180 bottom
JP8  1x6  [1X06]  80.3,77 191 bottom
JP9  1x04_1.27MM  [1X04-1.27MM]  113.3,49.8 0 bottom
L1  SRN2512-2R2M  [1008]  36.05,19.75 270 bottom
L2  BLM18KG121TN1D  [WUERTH-0805]  66.3,72.75 0 bottom
L3  0402/0R/5%  [L0402]  112.3,37 270 bottom
L4  DFE201610E-R47M=P2  [0806]  35.3,15.15 90 bottom
L5  0402/0R/5%  [L0402]  110.55,66.5 110 bottom
L6  0402/0R/5%  [L0402]  3.8,23 0 bottom
L7  LQM2HPN2R2MG0L  [1008]  14.3,33.2 180 bottom
L8  LQM2HPN1R0MG0L  [1008]  17.3,33.5 270 bottom
L9  LQM2HPN2R2MG0L  [1008]  23.8,32 270 bottom
LAYERS1  LAYER_NUMBRS_4_SMALL  [LAYER_NUMBERS_4_SMALL]  57.3,23.5 0 top
LCD  ER-TFT024-3  [ER-TFT024-3]  59.8,33.5 0 top
LED1  WS2812B  [WS2812B]  52.3,76.5 180 top
LED2  WS2812B  [WS2812B]  67.3,76.5 180 top
LED3  0603 RED  [LED-0603-CORRECT]  61.07,74.5 90 top
LED4  0603 GREEN  [LED-0603-CORRECT]  58.53,74.5 90 top
LED5  LED 5MM  [LED5MM]  33.8,10 0 top
LED6  0603 RED  [LED-0603-CORRECT]  43.55,28.75 180 bottom
LOGO1  LOGO_SIM  [SIM_ICON]  98.8,20 0 bottom
LOGO2  LOGO_MICROPYTHON-6MM  [LOGO_MICROPYTHON_6MM]  78.55,45.7 0 bottom
LOGO3  LOGO_HCD-4MM  [LOGO_HDC_4MM]  76.2,57.4 0 bottom
LOGO4  LOGO_TI-BY-4MM  [LOGO_TI_BY_4MM]  82.3,62 0 bottom
LOGO5  EMFLOGO-2018-6MM  [EMFLOGO-2018-6MM]  22.3,42 90 bottom
LOGO6  LOGO-SEEEDSTUDIO-SILK  [LOGO_SILK]  49.8,76 0 bottom
PCB  TiLDA Mk4 PCB  [TILDA_MK4_OUTLINE_TALL_V1]  59.8,0 0 top
Q1  2N7002PW  [SC70-3-R]  90.3,29.5 90 bottom
Q2  2N7002PW  [SC70-3-R]  105.8,13.75 90 bottom
Q3  CSD25402Q3A  [Q3A]  39.55,15.75 0 bottom
Q8  CSD13202Q2  [Q2]  74.3,38.75 270 bottom
R1  0402/1K/5%  [R0402-SMALLER]  44.3,67.5 270 bottom
R2  0402/1K/5%  [R0402-SMALLER]  45.3,67.5 270 bottom
R3  0402/4K87/5%  [R0402-SMALLER]  50.05,57.25 0 bottom
R4  0402/10K/5%  [R0402-SMALLER]  58.3,65.25 180 bottom
R5  0402/1M/5%  [R0402-SMALLER]  50.55,59.75 90 bottom
R6  0402/2K/5%  [R0402-SMALLER]  63.55,62.95 90 bottom
R7  0402/1M/5%  [R0402-SMALLER]  77.55,78 270 bottom
R8  0402/100R/5%  [R0402-SMALLER]  78.05,74.5 180 bottom
R9  0402/10K/5%  [R0402-SMALLER]  67.3,44.25 270 bottom
R10  0402/10K/5%  [R0402-SMALLER]  77.8,41.75 90 bottom
R11  [0309/10]  23.3,12.25 180 top
R12  0402/2K/5%  [R0402-SMALLER]  61.07,74.5 270 bottom
R13  0402/10K/5%  [R0402-SMALLER]  37.55,15.25 90 bottom
R14  0402/2K/5%  [R0402-SMALLER]  58.53,74.5 270 bottom
R15  0402/10K/5%  [R0402-SMALLER]  45.55,23.25 0 bottom
R16  0402/10K/5%  [R0402-SMALLER]  45.55,22.25 180 bottom
R17  0402/2K/5%  [R0402-SMALLER]  45.55,24.25 180 bottom
R18  0402/10K/5%  [R0402-SMALLER]  41.05,30.5 180 bottom
R19  0402/10K/5%  [R0402-SMALLER]  41.05,29.5 180 bottom
R20  0402/10K/5%  [R0402-SMALLER]  41.55,28 90 bottom
R21  0402/4K7/5%  [R0402-SMALLER]  45.85,48.25 90 bottom
R22  0402/4K7/5%  [R0402-SMALLER]  46.85,48.25 90 bottom
R23  0402/4K7/5%  [R0402-SMALLER]  72.05,49 180 bottom
R24  0402/4K7/5%  [R0402-SMALLER]  72.05,47.75 180 bottom
R25  0402/100K/5%  [R0402-SMALLER]  24.8,16.75 180 bottom
R26  0402/51R/5%  [R0402-SMALLER]  97.3,52.5 90 bottom
R27  0402/51R/5%  [R0402-SMALLER]  99.3,52.5 90 bottom
R28  0402/51R/5%  [R0402-SMALLER]  100.3,52.5 90 bottom
R29  0402/4K7/5%  [R0402-SMALLER]  106.3,30.75 180 bottom
R30  0402/100K/5%  [R0402-SMALLER]  88.3,29.5 90 bottom
R31  0402/1K/5%  [R0402-SMALLER]  89.8,41.25 180 bottom
R32  0402/1K/5%  [R0402-SMALLER]  89.8,42.25 180 bottom
R33  0402/1K/5%  [R0402-SMALLER]  89.8,39.25 180 bottom
R34  0402/1K/5%  [R0402-SMALLER]  89.8,38.25 180 bottom
R35  0402/1K/5%  [R0402-SMALLER]  89.8,37.25 180 bottom
R36  0402/1K/5%  [R0402-SMALLER]  89.8,33.25 180 bottom
R37  0402/1K/5%  [R0402-SMALLER]  89.8,35.25 180 bottom
R38  0402/5K6/5%  [R0402-SMALLER]  89.8,34.25 0 bottom
R39  0402/5K6/5%  [R0402-SMALLER]  89.8,36.25 0 bottom
R40  0402/5K6/5%  [R0402-SMALLER]  89.8,40.25 0 bottom
R41  0402/1K/5%  [R0402-SMALLER]  89.8,32.25 180 bottom
R42  0402/1K/5%  [R0402-SMALLER]  89.8,31.25 180 bottom
R43  0402/10K/5%  [R0402-SMALLER]  80.55,47 90 bottom
R44  0402/12R/5%  [R0402-SMALLER]  69.3,39 270 bottom
R45  0402/10K/5%  [R0402-SMALLER]  81.55,47 90 bottom
R46  0402/10K/5%  [R0402-SMALLER]  82.05,49.5 180 bottom
R47  0402/12R/5%  [R0402-SMALLER]  72.3,39 270 bottom
R48  0402/12R/5%  [R0402-SMALLER]  71.3,39 270 bottom
R49  0402/12R/5%  [R0402-SMALLER]  70.3,39 270 bottom
R50  0402/22K/5%  [R0402-SMALLER]  80.05,49.5 0 bottom
R51  0402/22K/5%  [R0402-SMALLER]  80.05,48.5 0 bottom
R52  0402/15K/5%  [R0402-SMALLER]  80.3,58.75 180 bottom
R53  0402/8K2/5%  [R0402-SMALLER]  78.3,58.75 0 bottom
R54  0402/10K/5%  [R0402-SMALLER]  85.3,54.5 270 bottom
R55  0402/10K/5%  [R0402-SMALLER]  87.55,49.75 180 bottom
R56  0402/10K/5%  [R0402-SMALLER]  94.05,59.5 180 bottom
R57  0402/150K/1%  [R0402-SMALLER]  21.75,59.45 0 bottom
R58  0402/150K/1%  [R0402-SMALLER]  21.75,58.45 0 bottom
R59  0402/10K/5%  [R0402-SMALLER]  103.8,13.75 90 bottom
R60  0402/732K/5%  [R0402-SMALLER]  28.75,14.35 270 bottom
R61  0402/162K/5%  [R0402-SMALLER]  29.75,14.35 90 bottom
R62  0402/10K/5%  [R0402-SMALLER]  11.8,16.75 270 bottom
R63  0402/100K/5%  [R0402-SMALLER]  9.05,35.2 90 bottom
R64  0402/100K/5%  [R0402-SMALLER]  10.05,35.2 90 bottom
R65  0402/100K/5%  [R0402-SMALLER]  12.8,16.75 270 bottom
R66  0402/10K/5%  [R0402-SMALLER]  8.3,40.25 90 bottom
R67  0402/100K/5%  [R0402-SMALLER]  10.8,37.25 180 bottom
R68  0402/100K/5%  [R0402-SMALLER]  24.8,19.75 180 bottom
R69  0402/100K/5%  [R0402-SMALLER]  24.8,17.75 180 bottom
R70  0402/100K/5%  [R0402-SMALLER]  26.55,26.5 90 bottom
R71  0402/100K/5%  [R0402-SMALLER]  18.3,16.25 270 bottom
R72  0402/100K/5%  [R0402-SMALLER]  13.8,15 270 bottom
R73  0402/100K/5%  [R0402-SMALLER]  9.05,29 90 bottom
R74  0402/10K/5%  [R0402-SMALLER]  18.55,56.5 0 bottom
R75  0402/0R/5%  [R0402-SMALLER]  20.8,61.5 180 bottom
R76  0402/10K/5%  [R0402-SMALLER]  73.8,27.75 90 bottom
R77  0402/150K/1%  [R0402-SMALLER]  21.75,60.4 0 bottom
R78  0402/150K/1%  [R0402-SMALLER]  21.8,57.5 0 bottom
S1  SKPMAPE010  [SKPMAPE010-COMBINED]  87.8,53.5 0 top
S2  SKPMAPE010  [SKPMAPE010-COMBINED]  100.3,53.5 0 top
S3  SKPMAPE010  [SKPMAPE010-COMBINED]  112.8,53.5 0 top
S4  SKPMAPE010  [SKPMAPE010-COMBINED]  87.8,41 0 top
S5  SKPMAPE010  [SKPMAPE010-COMBINED]  100.3,41 0 top
S6  SKPMAPE010  [SKPMAPE010-COMBINED]  112.8,41 0 top
S7  SKPMAPE010  [SKPMAPE010-COMBINED]  87.8,28.5 0 top
S8  SKPMAPE010  [SKPMAPE010-COMBINED]  100.3,28.5 0 top
S9  SKPMAPE010  [SKPMAPE010-COMBINED]  112.8,28.5 180 top
S10  SKPMAPE010  [SKPMAPE010-COMBINED]  87.8,16 0 top
S11  SKPMAPE010  [SKPMAPE010-COMBINED]  100.3,16 0 top
S12  SKPMAPE010  [SKPMAPE010-COMBINED]  112.8,16 0 top
S13  SKPMAPE010  [SKPMAPE010-COMBINED]  10.6,48 135 top
S14  SKPMAPE010  [SKPMAPE010-COMBINED]  20.6,53 180 top
S15  SKPMAPE010  [SKPMAPE010-COMBINED]  30.6,48 45 top
S16  3X6X2.5  [TACTILE_SWITCH_SMD_3X6X2.5H]  29.8,68 15 top
S17  3X6X2.5  [TACTILE_SWITCH_SMD_3X6X2.5H]  89.8,68 345 top
S18  CUS-12TB  [SWITCH-SPST-SMD-A]  59.8,7.1 180 bottom
S19  3X6X2.5  [TACTILE_SWITCH_SMD_3X6X2.5H]  71.8,8.25 180 bottom
S20  3X6X2.5  [TACTILE_SWITCH_SMD_3X6X2.5H]  47.8,8.25 180 bottom
S22  AYZ0202AGRLC  [AYZ-JS-COMBINED]  100.3,59.5 90 bottom
SW1  JOYSTICK  [JOYSTICK_MULTICOMP_NOSILK]  20.6,39 315 top
TP1  TP  [B1,27]  52.2,60.7 0 bottom
TP2  TP  [B1,27]  87.8,41.5 0 bottom
TP3  TP  [B1,27]  87.3,39.75 0 bottom
TP4  TP  [B1,27]  86.05,38.5 0 bottom
TP5  TP  [B1,27]  87.55,37.25 0 bottom
TP6  TP  [B1,27]  77.8,76 270 bottom
TP7  TP  [B1,27]  63.55,74 0 bottom
TP8  TP  [B1,27]  87.55,35.25 0 bottom
TP9  TP  [B1,27]  87.55,33.25 0 bottom
TP10  TP  [B1,27]  87.8,43.25 0 bottom
TP11  TP  [B1,27]  85.8,32.5 0 bottom
TP12  TP  [B1,27]  86.3,30.75 0 bottom
TP13  TP  [B1,27]  86.3,29 0 bottom
TP14  TP  [B1,27]  43.8,17 0 bottom
TP15  TP  [B1,27]  41.8,13.5 0 bottom
TP16  TP  [B1,27]  33.3,22 0 bottom
TP17  TP  [B1,27]  31.55,22 0 bottom
TP18  TP  [B1,27]  45.8,15.5 0 bottom
TP19  TP  [P1-06-OCT-CAN]  22.4,17.2 0 bottom
U1  ZX62-B-5PA(33)  [USB-AB-MICRO-SMD_LWK]  70.2,78 274 bottom
U4  MIC-6MM  [MIC-SMD-6MM]  95.3,70 270 bottom
U5  LDMS1540S-01-R8-0.8-R  [SPEAKER-15MM-SMD]  8.05,54.5 270 bottom
X1  ABS07-32.768KHZ-T  [RESONATOR_EPSON_FC_145]  54.2,64.75 180 bottom
X2  ABM8G-25.000MHZ-B4Y-T  [CRYSTAL-3.2-2.5]  62.55,66.55 180 bottom
X3  ABS07-32.768KHZ-T  [RESONATOR_EPSON_FC_145]  25.8,22.75 90 bottom
X4  ABM8-40.000MHZ-10-1-U-T  [CRYSTAL-3.2-2.5]  8.6,19.25 270 bottom

## Library data of the parts
ANT1 ANT2 BATT C1-C31 C33-C71 C78 C79 C81-C108 D1 D2 FL1 IC1-IC18 J1 J2 J4 J5 J8-J10 L1-L9 LCD LED1 LED2 LOGO1 PCB Q1-Q3 Q8 R1-R7 R9 R10 R12-R18 R20-R74 R76-R78 S1-S19 S22 SW1 TP19 U1 U4 U5 X1-X4 = TiLDA Mk4 Parts
ARTWORK1-ARTWORK7 C32 C72-C77 C80 FID1-FID6 J3 J11 JP1-JP9 LAYERS1 LED5 LOGO2-LOGO5 R8 R11 R19 R75 S20 = TiLDA Mk4 Parts; DNP: Y
J7 = CISECO eaglecad designs; DNP: Y
LED3 LED6 = TiLDA Mk4 Parts; COLOUR: RED
LED4 = TiLDA Mk4 Parts; COLOUR: GREEN
LOGO6 = TiLDA Mk4 Parts; DNP: Y; PARTNO: DNP
TP1 = TiLDA Mk4 Parts; TP_SIGNAL_NAME: !HIB
TP2 = TiLDA Mk4 Parts; TP_SIGNAL_NAME: SIM_DTR
TP3 = TiLDA Mk4 Parts; TP_SIGNAL_NAME: SIM_DCD
TP4 = TiLDA Mk4 Parts; TP_SIGNAL_NAME: SIM_CTS
TP5 = TiLDA Mk4 Parts; TP_SIGNAL_NAME: SIM_RTS
TP6 = TiLDA Mk4 Parts; TP_SIGNAL_NAME: USB_ID
TP7 = TiLDA Mk4 Parts; TP_SIGNAL_NAME: USB_VBUS
TP8 = TiLDA Mk4 Parts; TP_SIGNAL_NAME: SIM_RXD
TP9 = TiLDA Mk4 Parts; TP_SIGNAL_NAME: SIM_TXD
TP10 = TiLDA Mk4 Parts; TP_SIGNAL_NAME: SIM_RI
TP11 = TiLDA Mk4 Parts; TP_SIGNAL_NAME: SIM_STATUS
TP12 = TiLDA Mk4 Parts; TP_SIGNAL_NAME: SIM_NETLIGHT
TP13 = TiLDA Mk4 Parts; TP_SIGNAL_NAME: SIM_PWR_KEY
TP14 = TiLDA Mk4 Parts; TP_SIGNAL_NAME: VBAT
TP15 = TiLDA Mk4 Parts; TP_SIGNAL_NAME: VBATT
TP16 = TiLDA Mk4 Parts; TP_SIGNAL_NAME: 3V3
TP17 = TiLDA Mk4 Parts; TP_SIGNAL_NAME: GND
TP18 = TiLDA Mk4 Parts; TP_SIGNAL_NAME: V_UNREG

## Nets
3V3: C2.2 C3.2 C4.2 C5.2 C9.2 C10.2 C11.2 C12.2 C13.2 C14.2 C21.2 C22.2 C23.2 C24.2 C25.2 C26.2 C27.2 C28.2 C33.1 C38.2 C42.2 C43.2 C45.2 C47.1 C58.1 C59.2 C70.2 C71.2 C88.1 C89.1 C90.1 C91.1 C92.1 C93.1 C102.1 C103.1 C104.1 C107.1 C108.1 IC1.7 IC1.8 IC1.9 IC1.16 IC1.26 IC1.28 IC1.39 IC1.47 IC1.51 IC1.52 IC1.68 IC1.69 IC1.79 IC1.90 IC1.101 IC1.113 IC1.122 IC2.1 IC2.3 IC2.9 IC2.14 IC2.27 IC2.43 IC2.49 IC3.5 IC4.21 IC6.8 IC11.8 IC12.14 IC13.6 IC14.8 IC15.10 IC15.37 IC15.39 IC15.44 IC15.47 IC15.54 IC16.5 IC17.1 IC18.1 J2.1 J2.7 J2.8 J2.9 J2.35 J2.40 J2.41 J2.42 J3.1 J8.3 J8.7 J10.3 J10.7 J11.2 JP4.1 JP6.8 JP7.8 JP7.11 JP7.14 L4.2 PCB.3V3 R4.2 R5.2 R9.1 R10.1 R11.2 R21.2 R22.2 R23.2 R24.2 R50.2 R56.2 R60.1 R66.1 R67.2 R68.2 R69.2 R73.2 R76.2 SW1.COM TP16.TP
!HIB: IC1.65 TP1.TP
!RESET: C15.2 IC1.70 J3.10 R4.1 S19.2
!WAKE: IC1.64 R5.1 S20.2
ADC1_HALL: IC1.13 IC18.2
AIN6_SPK_ADC: IC1.126 IC11.7 R46.2
AMP_!SHUTDOWN: IC1.46 IC13.1 R74.1
AMP_IN_N [Audio]: IC13.4 R58.2 R78.2
AMP_IN_P [Audio]: J9.2 J9.3 R57.2 R75.2 R77.2
AMP_IN_R1_N: C106.1 R78.1
AMP_IN_R1_P: C105.1 R77.1
AMP_IN_R_N [Audio]: C82.1 R58.1
AMP_IN_R_P [Audio]: C83.1 R57.1
AMP_IN_TRS_P [Audio]: IC13.3 J9.5 J9.6 R75.1
BQ_!CE: IC8.9 R17.1
BQ_!INT: IC1.14 IC8.7
BQ_!PG: IC8.3
BQ_!QON: IC8.12 JP3.2
BQ_PMID: C36.1 IC8.23
BQ_PSEL: IC8.2 R18.1 R19.1
BQ_REGN: C39.2 IC8.22 R16.2
BQ_STAT: IC8.4 R20.1
BQ_STAT_R: LED6.C R20.2
BQ_SW: C37.2 IC8.19 IC8.20 L1.1
BQ_TS: IC8.11 R15.2 R16.1
BT_ANT [50R Single]: C74.2 IC5.20 L5.1
BT_ANT_L [50R Single]: ANT2.1 C75.2 L5.2
BTN_1: IC4.1 S1.2 S1.B1 S1.B2
BTN_2: IC4.3 S2.2 S2.B1 S2.B2
BTN_3: IC4.4 S3.2 S3.B1 S3.B2
BTN_4: IC4.7 S4.2 S4.B1 S4.B2
BTN_5: IC4.6 S5.2 S5.B1 S5.B2
BTN_6: IC4.5 S6.2 S6.B1 S6.B2
BTN_7: IC4.8 S7.2 S7.B1 S7.B2
BTN_8: IC4.10 S8.2 S8.B1 S8.B2
BTN_9: IC4.11 S9.2 S9.B1 S9.B2
BTN_10: IC4.14 S10.2 S10.B1 S10.B2
BTN_11: IC4.13 S11.2 S11.B1 S11.B2
BTN_12: IC4.12 S12.2 S12.B1 S12.B2
BTN_A: IC4.16 S13.2 S13.B1 S13.B2
BTN_B: IC4.17 S15.2 S15.B1 S15.B2
BTN_CALL: IC4.15 S16.2
BTN_END: IC4.2 S17.2
BTN_MENU: IC1.102 S14.2 S14.B1 S14.B2
BTST: C37.1 IC8.21
CC_!CTS: IC15.61
CC_!HIB: IC1.124 IC15.2 R25.1
CC_!RESET: C60.2 IC1.12 IC15.32 JP5.4 R73.1
CC_!RTS: IC15.50 R70.1
CC_IRQ: IC1.123 IC15.15 R72.1
CC_RCT_XTAL_N: C100.2 IC15.52 X3.P$1
CC_RESERVED@19: IC15.19 R65.1
CC_RTC_XTAL_P: C101.2 IC15.51 X3.P$2
CC_TEST62: IC15.62 TP19.TP
CC_WLAN_XTAL_: C99.2 IC15.22 X4.3
CC_WLAN_XTAL_P: C98.2 IC15.23 X4.1
DCDC_ANA2_SW_N: IC15.46
DCDC_ANA2_SW_P: IC15.45
DCDC_ANA_SW: IC15.38 L7.2
DCDC_DIG_SW: IC15.43 L9.2
DCDC_PA_SW_N: IC15.41 L8.1
DCDC_PA_SW_P: IC15.40 L8.2
EN0RXI_N [100R Diff]: IC1.53 JP7.6
EN0RXI_P [100R Diff]: IC1.54 JP7.7
EN0TXO_N [100R Diff]: IC1.56 JP7.12
EN0TXO_P [100R Diff]: IC1.57 JP7.13
ETHLED0: IC1.42 R1.2
ETHLED0_R: JP7.3 R1.1
ETHLED1: IC1.43 R2.2
ETHLED1_R: JP7.5 R2.1
FET: IC1.110 Q2.1 R59.1
FET_OUT: LED5.K PCB.FET Q2.3
FLASH_!CS: IC14.1 IC15.14 JP1.3 R67.1
FLASH_!HOLD: IC6.7 R9.2
FLASH_!WP: IC6.3 R10.2
FLASH_CLK: IC14.6 IC15.11 JP1.4
FLASH_MISO: IC14.2 IC15.13 JP1.2
FLASH_MOSI: IC14.5 IC15.12 JP1.5
FLASH_PU: IC14.3 IC14.7 R66.2
GMS_ANT_L [50R Single]: C73.2 D2.1 J4.ANT J7.1 L3.2
GND: ANT1.2 ANT1.3 ANT1.4 ANT2.2 ANT2.3 ANT2.4 C1.2 C2.1 C3.1 C4.1 C5.1 C6.1 C7.1 C8.1 C9.1 C10.1 C11.1 C12.1 C13.1 C14.1 C15.1 C16.1 C17.1 C18.1 C19.1 C20.1 C21.1 C22.1 C23.1 C24.1 C25.1 C26.1 C27.1 C28.1 C29.- C30.1 C31.1 C32.- C33.2 C34.2 C35.2 C36.2 C38.1 C39.1 C40.2 C41.2 C42.1 C43.1 C44.2 C45.1 C46.2 C47.2 C48.1 C49.1 C50.1 C51.1 C53.2 C54.2 C55.2 C57.2 C58.2 C59.1 C60.1 C61.2 C62.2 C63.2 C65.2 C66.2 C67.2 C69.2 C70.1 C71.1 C72.1 C73.1 C74.1 C75.1 C76.1 C77.1 C78.1 C84.2 C85.2 C86.2 C87.2 C88.2 C89.2 C90.2 C91.2 C92.2 C93.2 C94.2 C95.2 C96.2 C97.2 C98.1 C99.1 C100.1 C101.1 C102.2 C104.2 C106.2 C107.2 C108.2 D1.A D2.2 FL1.GND@2 FL1.GND@4 IC1.10 IC1.17 IC1.48 IC1.55 IC1.58 IC1.80 IC1.114 IC2.6 IC2.12 IC2.28 IC2.41 IC2.46 IC2.52 IC2.54 IC3.2 IC3.3 IC4.9 IC4.18 IC4.23 IC4.24 IC4.25 IC5.8 IC5.13 IC5.19 IC5.21 IC5.27 IC5.30 IC5.31 IC5.33 IC5.36 IC5.37 IC6.4 IC7.3 IC8.17 IC8.18 IC8.25 IC9.3 IC9.5 IC10.3 IC11.4 IC12.7 IC13.7 IC13.PAD IC14.4 IC15.PAD IC16.2 IC16.4 IC17.2 IC17.3 IC17.PAD IC18.3 J1.C4 J1.C5 J1.GND1 J1.GND2 J1.GND3 J1.GND4 J1.GND5 J1.GND6 J2.6 J2.11 J2.12 J2.13 J2.14 J2.15 J2.16 J2.17 J2.18 J2.19 J2.20 J2.21 J2.22 J2.23 J2.24 J2.25 J2.26 J2.27 J2.28 J2.29 J2.30 J2.31 J2.32 J2.43 J2.48 J2.49 J2.50 J3.3 J3.5 J3.9 J5.1 J7.G@1 J7.G@2 J7.G@3 J7.G@4 J8.4 J8.8 J8.SS1 J8.SS2 J9.4 J10.4 J10.8 J10.SS1 J10.SS2 J11.1 JP1.1 JP2.1 JP3.1 JP4.5 JP5.1 JP6.1 JP7.1 JP7.2 JP7.4 JP8.1 JP9.1 LED1.3 LED2.3 LED3.C LED4.C PCB.GND Q1.2 Q2.2 Q8.4 Q8.EP2 R3.2 R7.2 R15.1 R17.2 R19.2 R25.2 R30.2 R38.2 R39.2 R40.2 R51.2 R55.1 R59.2 R61.2 R62.2 R63.2 R64.2 R65.2 R70.2 R71.2 R72.2 R74.2 S1.1 S1.A1 S1.A2 S2.1 S2.A1 S2.A2 S3.1 S3.A1 S3.A2 S4.1 S4.A1 S4.A2 S5.1 S5.A1 S5.A2 S6.1 S6.A1 S6.A2 S7.1 S7.A1 S7.A2 S8.1 S8.A1 S8.A2 S9.1 S9.A1 S9.A2 S10.1 S10.A1 S10.A2 S11.1 S11.A1 S11.A2 S12.1 S12.A1 S12.A2 S13.1 S13.A1 S13.A2 S14.1 S14.A1 S14.A2 S15.1 S15.A1 S15.A2 S16.1 S17.1 S18.2 S19.1 S20.1 TP17.TP U1.GND X2.2 X2.4 X4.2 X4.4
GSM_ANT [50R Single]: C72.2 IC5.32 L3.1
HDC_INT: IC1.95 IC3.4
HEADSET_DET: IC1.98 J9.7
I2C4_SCL: IC1.61 IC3.6 IC4.19 IC8.5 IC16.1 IC17.4 R22.1
I2C4_SDA: IC1.60 IC3.1 IC4.20 IC8.6 IC16.6 IC17.6 R21.1
I2C5_EXT_SCL: IC1.121 J8.1 J8.5 J11.3 JP6.6 PCB.SCL R24.1
I2C5_EXT_SDA: IC1.120 J8.2 J8.6 J11.4 JP6.7 PCB.SDA R23.1
JOY_CEN: IC1.72 SW1.CTR
JOY_DOWN: IC1.74 SW1.D
JOY_LEFT: IC1.73 SW1.C
JOY_RIGHT: IC1.91 SW1.B
JOY_UP: IC1.71 SW1.A
LCD_!RST: IC1.111 J2.10
LCD_DCX: IC1.20 J2.36
LCD_TEAR: IC1.21 J2.39
LED1: IC1.86 R12.2
LED1_R: LED3.A R12.1
LED2: IC1.85 R14.2
LED2_R: LED4.A R14.1
LED5_R: LED5.A R11.1
LEDK: Q8.1 Q8.2 Q8.5 Q8.6 Q8.EP1 R44.1 R47.1 R48.1 R49.1
LEDK1: J2.2 R47.2
LEDK2: J2.3 R48.2
LEDK3: J2.4 R49.2
LEDK4: J2.5 R44.2
MIC_MUX_N [Audio]: IC5.10 IC12.9 IC12.11
MIC_MUX_P [Audio]: IC5.9 IC12.1 IC12.3
MIC_N [Audio]: C52.2 C53.1 C55.1 C56.2 S22.6 U4.-
MIC_P [Audio]: C52.1 C54.1 C56.1 C57.1 S22.3 U4.+
MIC_PWM_AMP: C79.1 C80.2 C81.2 IC11.1 IC11.2
MIC_PWM_AMP_+: C78.2 IC11.3 R52.2
MIC_PWM_N [Audio]: C80.1 IC12.8 R54.1
MIC_PWM_P [Audio]: C81.1 IC12.4 R54.2
MIC_PWM_R: C79.2 R52.1 R53.1
MIC_SWITCHED_N [Audio]: IC12.10 S22.5
MIC_SWITCHED_P [Audio]: IC12.2 J9.1 S22.2
MUX_A: IC1.105 IC12.12 IC12.13 R56.1
MUX_B: IC1.106 IC12.5 IC12.6 R55.2
NETLIGHT_R: IC5.41 R42.2
NRST: JP4.3
OSC0: C16.2 IC1.88 X2.1
OSC1: IC1.89 R6.1
OSC1_R: C17.2 R6.2 X2.3
POWER_SWITCH: Q3.4 R13.1 S18.3
PWM2_SPK_PWM: C105.2 IC1.44
PWM3_MIC_PWM: IC1.45 R53.2
PWM6_LCD_BLIGHT: IC1.63 Q8.3
PWR_KEY_FET: IC5.39 Q1.3
RBIAS+: IC1.59 R3.1
SDRAM_!CAS: IC1.83 IC2.17
SDRAM_!CS: IC1.103 IC2.19
SDRAM_!RAS: IC1.84 IC2.18
SDRAM_!WE: IC1.92 IC2.16
SDRAM_A0: IC1.29 IC2.2 IC2.23
SDRAM_A1: IC1.30 IC2.4 IC2.24
SDRAM_A2: IC1.31 IC2.5 IC2.25
SDRAM_A3: IC1.32 IC2.7 IC2.26
SDRAM_A4: IC1.22 IC2.8 IC2.29
SDRAM_A5: IC1.23 IC2.10 IC2.30
SDRAM_A6: IC1.24 IC2.11 IC2.31
SDRAM_A7: IC1.25 IC2.13 IC2.32
SDRAM_A8: IC1.40 IC2.33 IC2.42
SDRAM_A9: IC1.41 IC2.34 IC2.44
SDRAM_A10: IC1.50 IC2.22 IC2.45
SDRAM_A11: IC1.49 IC2.35 IC2.47
SDRAM_A12: IC1.75 IC2.36 IC2.48
SDRAM_BA0: IC1.76 IC2.20 IC2.50
SDRAM_BA1: IC1.77 IC2.21 IC2.51
SDRAM_CKE: IC1.104 IC2.37
SDRAM_CLK: IC1.62 IC2.38
SDRAM_D15: IC1.78 IC2.53
SDRAM_DQMH: IC1.82 IC2.39
SDRAM_DQML: IC1.81 IC2.15
SIM_CLK: IC10.2 J1.C3 R27.2
SIM_CLK_R: C49.2 IC5.16 R27.1
SIM_CTS: R34.1 TP4.TP
SIM_CTS_R: IC5.4 R34.2
SIM_D_N [90R Diff]: IC5.26 JP9.2
SIM_D_P [90R Diff]: IC5.25 JP9.3
SIM_DATA: IC10.1 J1.C7 R26.2
SIM_DATA_R: C50.2 IC5.15 R26.1
SIM_DCD: R33.1 TP3.TP
SIM_DCD_R: IC5.5 R33.2
SIM_DET: IC5.14 J1.C8 R29.2
SIM_DTR: R31.1 TP2.TP
SIM_DTR_R: IC5.6 R31.2 R40.1
SIM_NETLIGHT: IC1.108 R42.1 TP12.TP
SIM_PWR_KEY: IC1.109 Q1.1 R30.1 TP13.TP
SIM_RI: IC1.112 R32.1 TP10.TP
SIM_RI_R: IC5.7 R32.2
SIM_RST: IC10.4 J1.C2 R28.2
SIM_RST_R: C48.2 IC5.17 R28.1
SIM_RTS: R35.1 TP5.TP
SIM_RTS_R: IC5.3 R35.2 R39.1
SIM_RXD_R: IC5.2 R37.2 R38.1
SIM_STATUS: IC1.107 R41.1 TP11.TP
SIM_STATUS_R: IC5.42 R41.2
SIM_TXD_R: IC5.1 R36.2
SIM_VBUS: IC5.24 JP9.4
SIM_VDD: C51.2 IC5.18 IC10.5 J1.C1
SOP0: IC15.35 R64.1
SOP1: IC15.34 R63.1
SOP2: IC15.21 R62.1
SPK_AMP_N [Audio]: IC13.8 U5.-
SPK_AMP_P [Audio]: IC13.5 U5.+
SPK_N [Audio]: C64.2 C65.1 C67.1 C68.2 C82.2 IC5.12 R43.1
SPK_P [Audio]: C64.1 C66.1 C68.1 C69.1 C83.2 IC5.11 R45.1
SPK_R_N: IC11.5 R45.2 R46.1
SPK_R_P: IC11.6 R43.2 R50.1 R51.1
SSI0_LCD_CLK: IC1.35 J2.37
SSI0_LCD_CS: IC1.36 J2.38
SSI0_LCD_MISO: IC1.38 J2.33
SSI0_LCD_MOSI: IC1.37 J2.34
SSI2_CC_!CS: IC1.3 IC15.8
SSI2_CC_CLK: IC1.4 IC15.5
SSI2_CC_MISO: IC1.1 IC15.7 R71.1
SSI2_CC_MOSI: IC1.2 IC15.6
SSI3_CLK: IC1.5 IC6.6
SSI3_DAT0: IC1.11 IC6.5
SSI3_DAT1: IC1.27 IC6.2
SSI3_FSS: IC1.6 IC6.1
SW: IC9.6 L4.1
SWCLK: IC1.100 J3.4 JP4.4
SWDIO: IC1.99 J3.2 JP4.2
SWO: IC1.97 J3.6 JP4.6
T3CCPO_WS2812: IC1.125 LED1.4
T4CCP0: IC1.127 JP6.4 PCB.CH2
T4CCP1: IC1.128 JP6.5 PCB.CH1
TCA_!INT: IC1.15 IC4.22 R76.1
TPS_FB: C103.2 IC9.2 R60.2 R61.1
UART0_CON_RX: IC1.33 JP8.4
UART0_CON_TX: IC1.34 JP8.5
UART1_SIM_RX: IC1.118 R36.1 TP9.TP
UART1_SIM_TX: IC1.119 R37.1 TP8.TP
UART3_CC_RX: IC1.116 IC15.55 JP5.3 R68.1
UART3_CC_TX: IC1.117 IC15.57 JP5.2 R69.1
UART4_EXT_RX: IC1.18 J10.1 J10.5 JP6.3 PCB.CH3
UART4_EXT_TX: IC1.19 J10.2 J10.6 JP6.2 PCB.CH4
USB_D_N [90R Diff]: IC1.93 IC7.1 U1.D-
USB_D_P [90R Diff]: IC1.94 IC7.2 U1.D+
USB_ID: R8.2 TP6.TP
USB_ID_R: IC7.4 R8.1 U1.ID
USB_SHIELD: C20.2 R7.1 U1.SHIELD U1.SHIELD@0 U1.SHIELD@1 U1.SHIELD@2 U1.SHIELD@3 U1.SHIELD@5
V_UNREG: C40.1 IC8.15 IC8.16 L1.2 PCB.VBATT Q3.5 Q3.6 Q3.7 Q3.8 Q3.EP R13.2 R18.2 TP18.TP
VBAT: C34.1 C35.1 IC8.13 IC8.14 J5.2 TP14.TP
VBATT: C1.1 C29.+ C30.2 C31.2 C32.+ C46.1 D1.C IC5.34 IC5.35 IC9.1 IC9.7 JP2.2 LED1.1 LED2.1 Q3.1 Q3.2 Q3.3 TP15.TP
VBUS: C41.1 IC1.96 IC7.5 IC8.1 IC8.24 L2.2 LED6.A TP7.TP
VBUS_L: L2.1 U1.VBUS
VDD_ANA: C44.1 C61.1 C62.1 C63.1 IC15.25 IC15.36 IC15.48 L7.1
VDD_DIG_CC: C87.1 C96.1 C97.1 IC15.9 IC15.56 L9.1
VDD_EXT: IC5.40 R29.1
VDD_PA: C84.1 C85.1 C86.1 IC15.33 IC15.42
VDD_PLL: C94.1 IC15.24
VDD_RAM: C95.1 IC15.49
VDDC: C6.2 C7.2 C8.2 IC1.87 IC1.115
WFIF_ANT_L [50R Single]: ANT1.1 C77.2 L6.2
WIFI_ANT [50R Single]: C76.2 FL1.OUT L6.1
WIFI_ANT_F [50R Single]: FL1.IN IC15.31
WS2812_OUT: JP2.3 LED2.2
WS28212_1: LED1.2 LED2.4
XOSC0: C18.2 IC1.66 X1.P$1
XOSC1: C19.2 IC1.67 X1.P$2

## Tracks (layer width: path | path; a pad name or v marks a point on that pad's centre or on a via)
3V3  (via drill 0.3)  (5 unrouted)
  Top 0.2: IC17.1 84.49,9.35 arc45 v84.85,9.5
  Top 0.3: SW1.COM 23.38,36.17 v22.3,37.25
  Bottom 0.15: v74.3,18.75 C102.1 73.8,19.5 arc-90 73.3,20 73.3,20.16 arc-90 IC16.5
  Bottom 0.2: IC1.9 62.8,43.75 C13.2 | IC1.8 63.2,46.19 arc-45 63.35,46.55 v63.55,46.75 63.6,46.7 IC1.7 | IC1.16 60,44.01 arc45 60.15,43.65 C12.2 v60.3,42.75 | IC1.47 51.26,52.4 arc45 C10.2 | IC1.113 67.94,52.8 arc45 68.64,53.09 C9.2 | IC1.79 59.2,61.44 arc45 58.91,62.14 C11.2 | IC1.69 55.2,59.86 arc-45 v55.05,59.5 54.95,59.6 arc-45 54.8,59.96 IC1.68 | 20.55,27.28 IC15.47 | IC1.90 63.6,59.55 v63.55,59.5 | IC1.51 v50.8,54 50.91,54.11 arc-45 51.61,54.4 IC1.52 | IC1.39 v53.3,49.2 | IC1.28 55.2,44.35 arc90 v55.55,44 arc90 56,44.45 IC1.26 | R9.1 v67.3,45.5 | IC1.122 66.42,49.2 arc-45 v66.3,49.25 | v84.85,9.5 C104.1 | IC1.101 68.75,57.6 v68.9,57.45 | R24.2 v72.55,47 | R23.2 72.87,49.32 arc-45 v73.3,49.5 | R66.1 8.3,39.5 arc-45 v8.05,38.9
  Bottom 0.25: J2.41 52.05,38 | J2.40 52.55,37.29 arc45 52.4,37.65 52.05,38 | J2.42 51.55,37.29 arc-45 51.7,37.65 52.05,38 | J2.35 v55.05,35.5 | J2.1 v72.05,35.5 | J2.8 v68.55,38 | J2.7 69.05,37.5 v68.55,38 | J2.9 68.05,37.5 v68.55,38 | C13.2 63.05,42.12 C14.2 63.3,41.62 v63.3,40.75 | v49.8,52.1 C10.2 | v70.05,53.75 C9.2 | v58.8,63 C11.2 | R4.2 v58.8,66 | R5.2 v49.8,60.25 | C89.1 19.96,28.5 arc45 19.26,28.21 arc45 19.05,27.71 IC15.44 | IC15.39 16.55,29.55 C90.1 | IC15.37 15.55,29.35 C88.1 | C91.1 v15.8,16.25 16.26,16.71 arc45 16.55,17.41 IC15.10 | C92.1 v23.8,23.5 23.7,23.6 arc45 23.34,23.75 IC15.54 | IC4.21 C21.2 | v73.8,30.3 R76.2 | JP7.8 62.15,71.71 arc45 62.3,72.06 C3.2 | IC13.6 20.92,51.02 v20.85,50.95 C58.1
  Bottom 0.3: 21.02,27.75 20.55,27.28 | R73.2 v9.05,30.25 | JP4.1 85.43,62.63 v85.8,63 | IC12.14 94.61,59.44 R56.2 C71.2 v93.55,60.5 | IC6.8 69.15,46.15 C2.2 v69.05,47 | R10.1 v77.8,40.5 | C28.2 42.23,42.25 IC2.27 42.13,42.25 v41.05,42.25 | v32.05,54.5 arc-45 31.57,54.3 IC2.43 29.6,54.3 C24.2 | v32.05,59 31.95,59.1 IC2.49 29.65,59.1 C27.2 | v41.05,61.5 IC2.3 C22.2 | v41.05,63.25 41.2,63.1 IC2.1 43.45,63.1 C26.2 | v41.05,56.75 41.1,56.7 IC2.9 43.5,56.7 C23.2 | v41.05,52.75 41.1,52.7 IC2.14 43.5,52.7 C25.2 | C42.2 v25.8,34.5 | C42.2 26.55,35 v26.55,34.5 | C42.2 25.05,35 v25.05,34.5 | v78.8,49.5 R50.2 | C103.1 R60.1 | R22.2 R21.2 v45.1,48.75 | C88.1 v14.65,29.5 | C4.2 68.69,68.61 JP7.11 | v80.4,50.45 C70.2 79.83,50.73 IC11.8 | J10.7 J10.3 | J8.7 J8.3 | IC3.5 C107.1 v78.4,7
  Bottom 0.4: 21.02,27.75 21.99,27.75 arc45 22.69,28.04 C93.1 23.4,29.39 arc-45 23.55,29.75 v23.8,30 | v21.05,29.75 21.05,29.66 arc-45 20.76,28.96 20.5,28.7 C89.1 20.3,28.7 v20.3,29.75 | C90.1 16.9,29.7 v17.45,30.25 | v26.05,19.75 R68.2 | v26.05,17.75 R69.2 | v15.8,36.15 16.3,36.15 arc90 17.3,37.15 C59.2 17.3,37.53 arc45 17.01,38.24 IC14.8 | R67.2 v12.05,37.25 | v74.3,26.5 C21.2 | v28.75,15.6 R60.1 | C43.2 v20.3,13 | C43.2 20.8,13.75 v20.3,13.75 | C43.2 20.8,12.25 v20.3,12.25 | IC18.1 86.85,10 C108.1 85.76,10 arc45 85.06,9.71 v84.85,9.5 | TP16.TP 33.35,21.95 v33.35,20.65
  Bottom 0.5: C5.2 76.94,70 JP7.14
  other vias: 52.3,41.25 32.95,20.15 33.75,20.15 34.1,24.35 33.8,23.35 33.5,23.95
  pour 3V3@2 (isolate 0.254, rank 6): 0,62.5 0,9 arc31 31.8,0 34.5,0 arc90 37.3,2.8 arc-90 39.3,4.8 80.3,4.8 arc-90 82.3,2.8 arc90 85.1,0 87.8,0 arc31 119.6,9 119.6,32.5 113.3,32.5 113.3,62.5 119.6,62.5 arc64 113.05,70.25 arc24 59.8,80.5 arc24 6.55,70.25 arc55
  pour Bottom (no thermals): 52.05,40 52.05,41.3 52.25,41.5 52.6,41.5 52.8,41.3 52.8,39.75 52.3,39.25 52.3,37.75 51.8,37.75 51.8,39.75
  pour Bottom (no thermals): 36.1,15.65 34.55,15.65 34.15,16.05 arc45 33.79,16.2 32.65,16.2 32.65,23.39 arc-45 32.8,23.75 33.65,24.6 arc-45 34.01,24.75 34.05,24.75 arc-90 34.55,24.25 34.55,24.11 arc-45 34.4,23.75 34.25,23.6 arc45 34.1,23.24 34.1,17.4 arc90 34.6,16.9 35.6,16.9 arc-90 36.1,16.4
  pour Top: 24.15,34.85 22.45,33.15 arc-45 22.09,33 16.21,33 arc45 15.51,32.71 14.59,31.79 arc45 14.3,31.09 14.3,28 arc90 15.3,27 20.89,27 arc45 21.59,27.29 25.51,31.21 arc45 25.8,31.91 25.8,32.29 arc-45 25.95,32.65 27.15,33.85 arc45 27.3,34.21 27.3,34.5 arc90 26.8,35 24.51,35 arc45
!HIB
  Bottom 0.2: IC1.65 53.6,61.24 arc45 53.45,61.6 53.4,61.65 arc90 52.7,61.65 52.2,61.15 TP1.TP
!RESET  (via drill 0.3)
  Top 0.15: v77.5,44.2 77.5,43.81 arc-45 77.21,43.11 76.62,42.52 arc45 76.33,41.81 76.33,35.15 arc-45 76.3,35.08 76.23,35.01 arc45 76.2,34.94 76.2,31.76 arc-45 75.91,31.06 74.04,29.19 arc-45 73.34,28.9 72.11,28.9 arc45 71.41,28.61 v68.3,25.5
  Top 0.2: J3.10 86.63,62.84 arc45 86.4,62.27 86.4,58.05 arc-90 85.4,57.05 v78,57.05 76.99,58.06 arc45 76.29,58.35 68.26,58.35 arc-45 67.55,58.64 65.94,60.25 arc45 65.59,60.4 65.47,60.4 arc-45 64.76,60.69 61.82,63.63 arc-45 61.53,64.34 arc45 61.4,64.65 59.63,66.42 arc90 58.22,66.42 v58.05,66.25
  3V3@2 0.15: v78,57.05 78,54.8 76.42,53.23 76.42,52.38 76.3,52.26 76.3,46.65 77.5,45.45 v77.5,44.2
  Bottom 0.15: IC1.70 55.6,61.59 arc-45 55.75,61.95 56.05,62.25 arc-45 56.41,62.4 56.59,62.4 arc45 56.95,62.55 57.65,63.25 arc45 57.8,63.61 C15.2 | R4.1 57.8,65.79 arc-45 57.95,66.15 v58.05,66.25 | v68.3,25.5 68.3,19.82 arc45 68.81,18.59 73.89,13.51 arc45 75.12,13 78.25,13 arc-90 79.5,11.75 79.5,10.16 arc-45 79.21,9.46 78.21,8.46 arc-45 78.07,8.4 77.36,8.4 arc45 77.22,8.34 77.18,8.31 arc-45 77.04,8.25 S19.2
  Bottom 0.2: C15.2 R4.1
!WAKE  (via drill 0.3)
  Top 0.15: v54.3,59.2 55.91,57.59 arc45 56.61,57.3 59.67,57.3 arc45 60.02,57.45 60.61,58.03 arc-45 61.31,58.33 65.03,58.33 arc-45 65.56,58.1 68.2,55.47 arc45 68.91,55.17 70.04,55.17 70.07,55.2 74.34,55.2 arc45 75.05,55.49 75.32,55.77 arc-45 75.47,55.83 75.73,55.83 arc-45 75.88,55.77 75.98,55.66 arc45 76.12,55.6 76.29,55.6 arc-45 76.99,55.31 v78.3,54 | v69.3,25.5 69.32,25.52 arc-45 69.55,26.07 71.78,28.31 arc-45 72.49,28.6 73.46,28.6 arc45 74.17,28.89 76.21,30.93 arc45 76.5,31.64 76.5,34.82 arc-45 76.53,34.89 76.6,34.96 arc45 76.62,35.03 76.62,41.66 arc-45 76.92,42.37 v78.02,43.48
  3V3@2 0.15: v78.02,43.48 78.02,44.58 77.9,44.7 77.9,45.48 76.6,46.78 76.6,52.13 76.72,52.26 76.72,52.42 v78.3,54
  Bottom 0.15: S20.2 52.05,8.25 53.01,7.29 arc45 53.71,7 56.68,7 arc-45 57.38,6.71 57.77,6.32 arc45 58.12,6.17 61.48,6.17 arc45 61.83,6.32 62.21,6.71 arc-45 62.92,7 75.89,7 arc45 76.59,7.29 77.34,8.04 arc-45 77.48,8.1 78.19,8.1 arc45 78.33,8.16 79.43,9.26 arc45 79.8,10.14 79.8,11.8 arc90 78.3,13.3 75.2,13.3 arc-45 74.14,13.74 69.14,18.74 arc-45 68.7,19.8 68.7,24.49 arc-45 68.99,25.19 v69.3,25.5 | IC1.64 v54.3,59.2
  Bottom 0.2: IC1.64 50.5,59.2 R5.1
ADC1_HALL  (via drill 0.3)
  Top 0.15: v70.8,41 v72.05,41